# EAGLE board expLoRaBLE Thing Plus-Panel_v10 (EAGLE 9.6.2), part 1 of 7
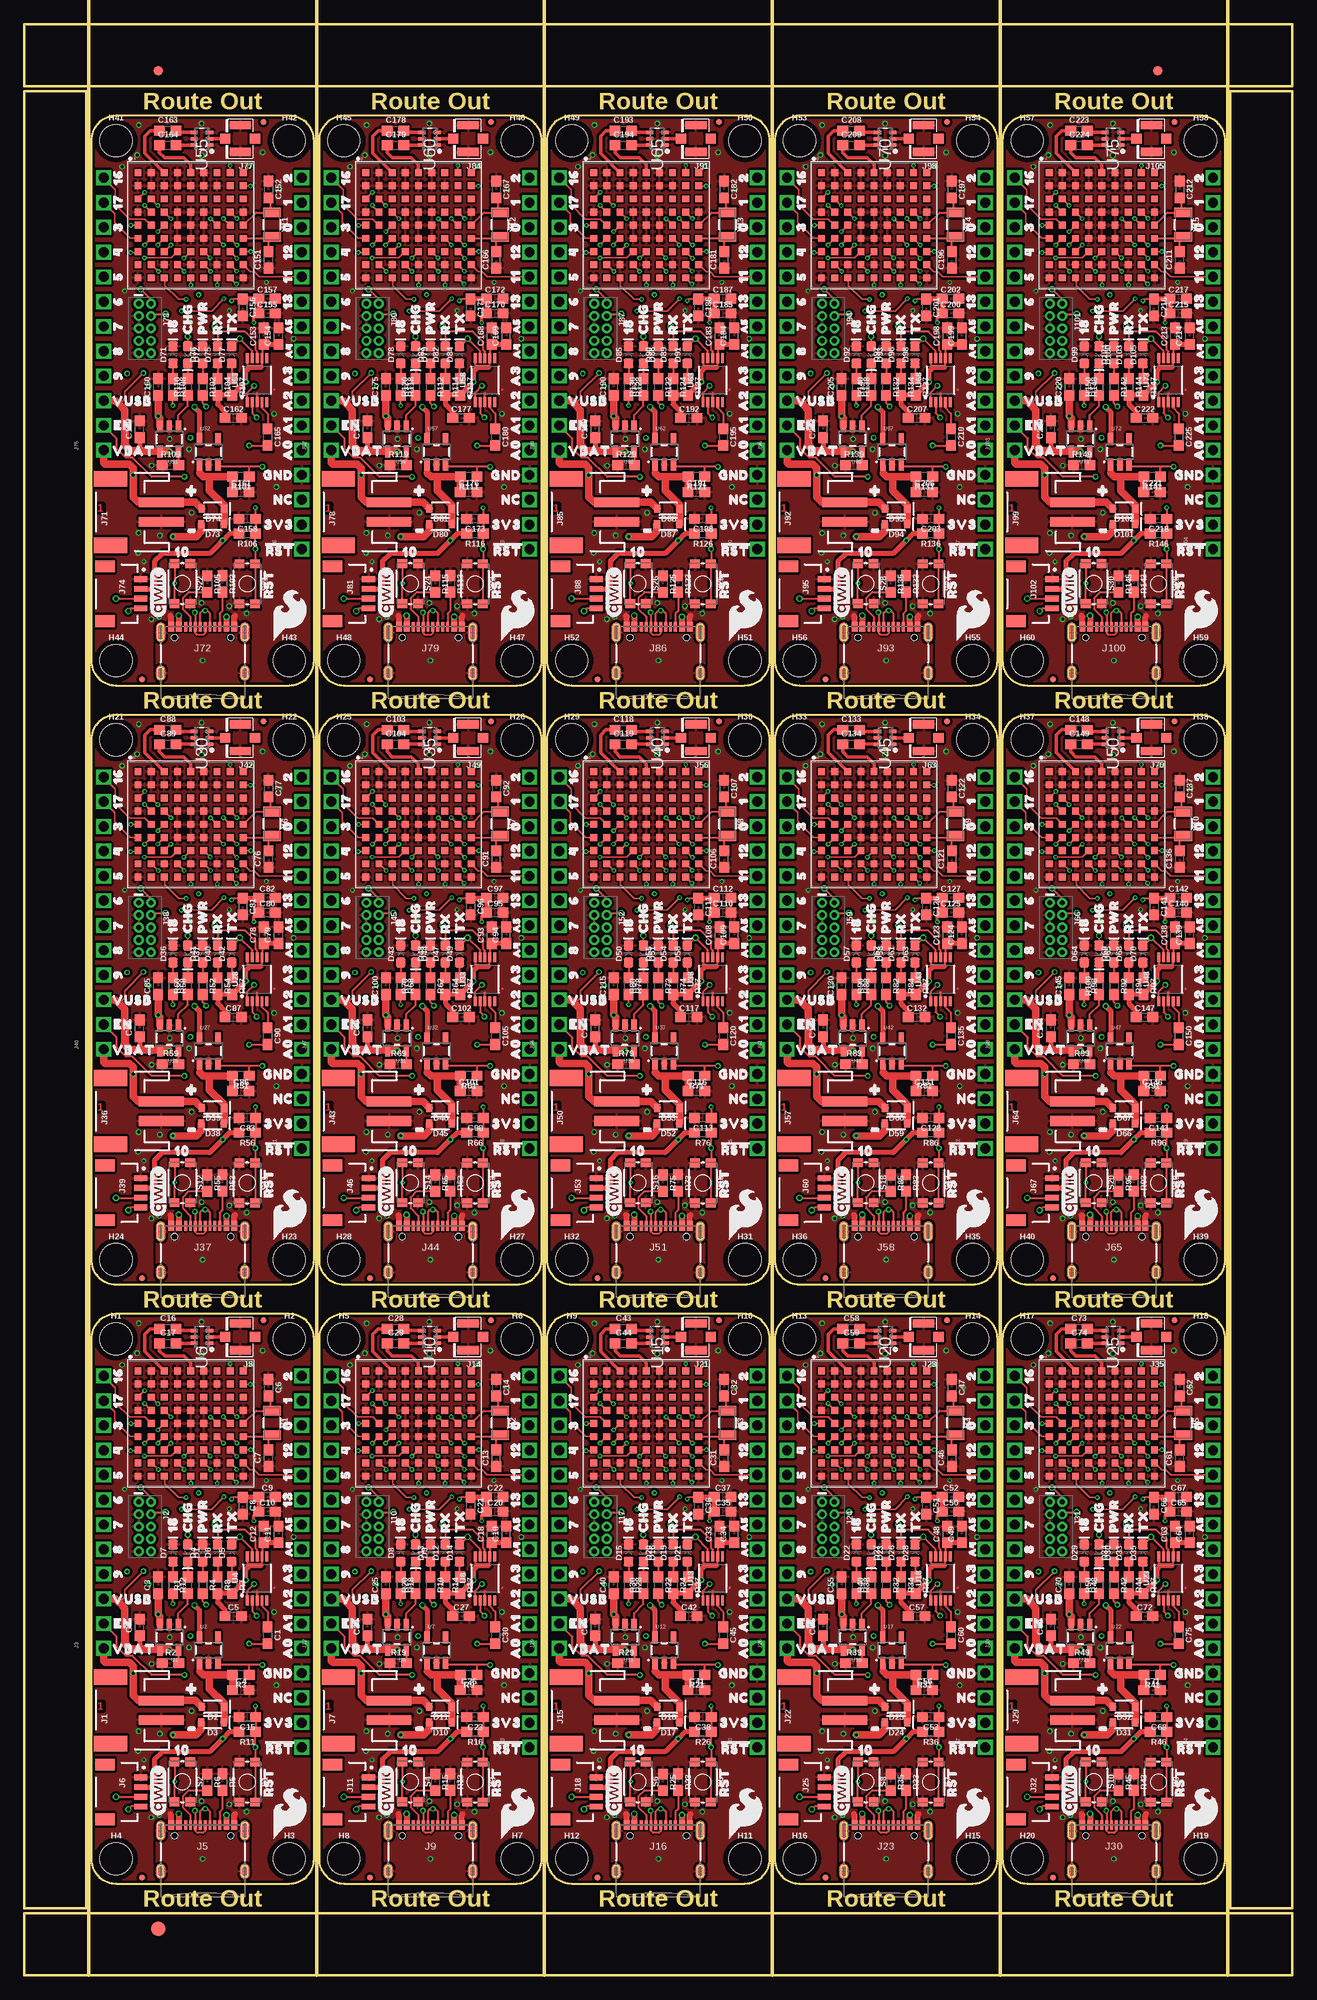
[diagram p0: board, top side]
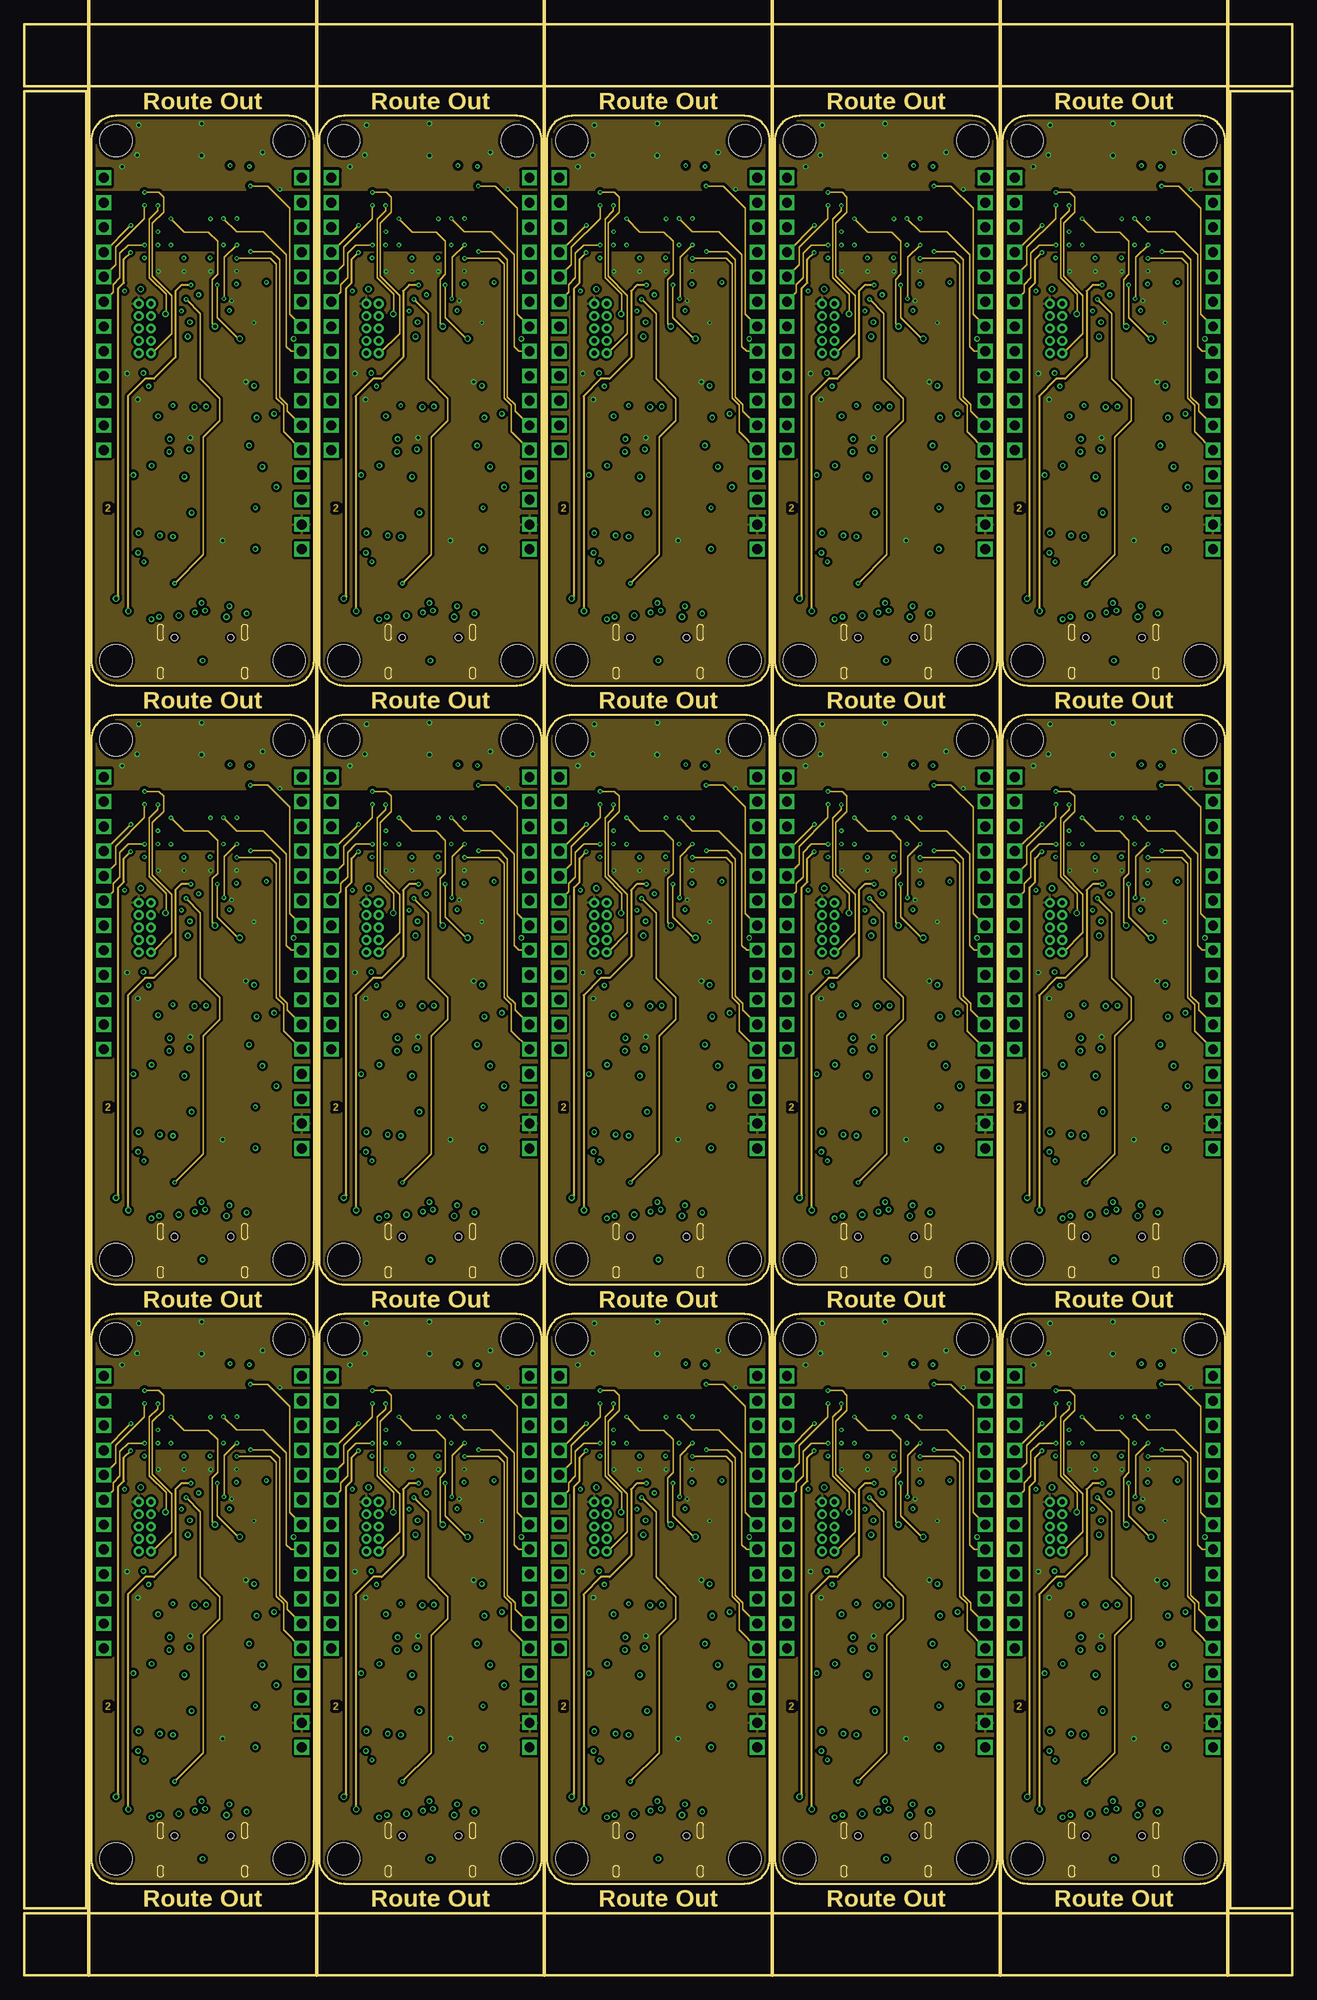
[diagram p1: board, inner layer Route2]
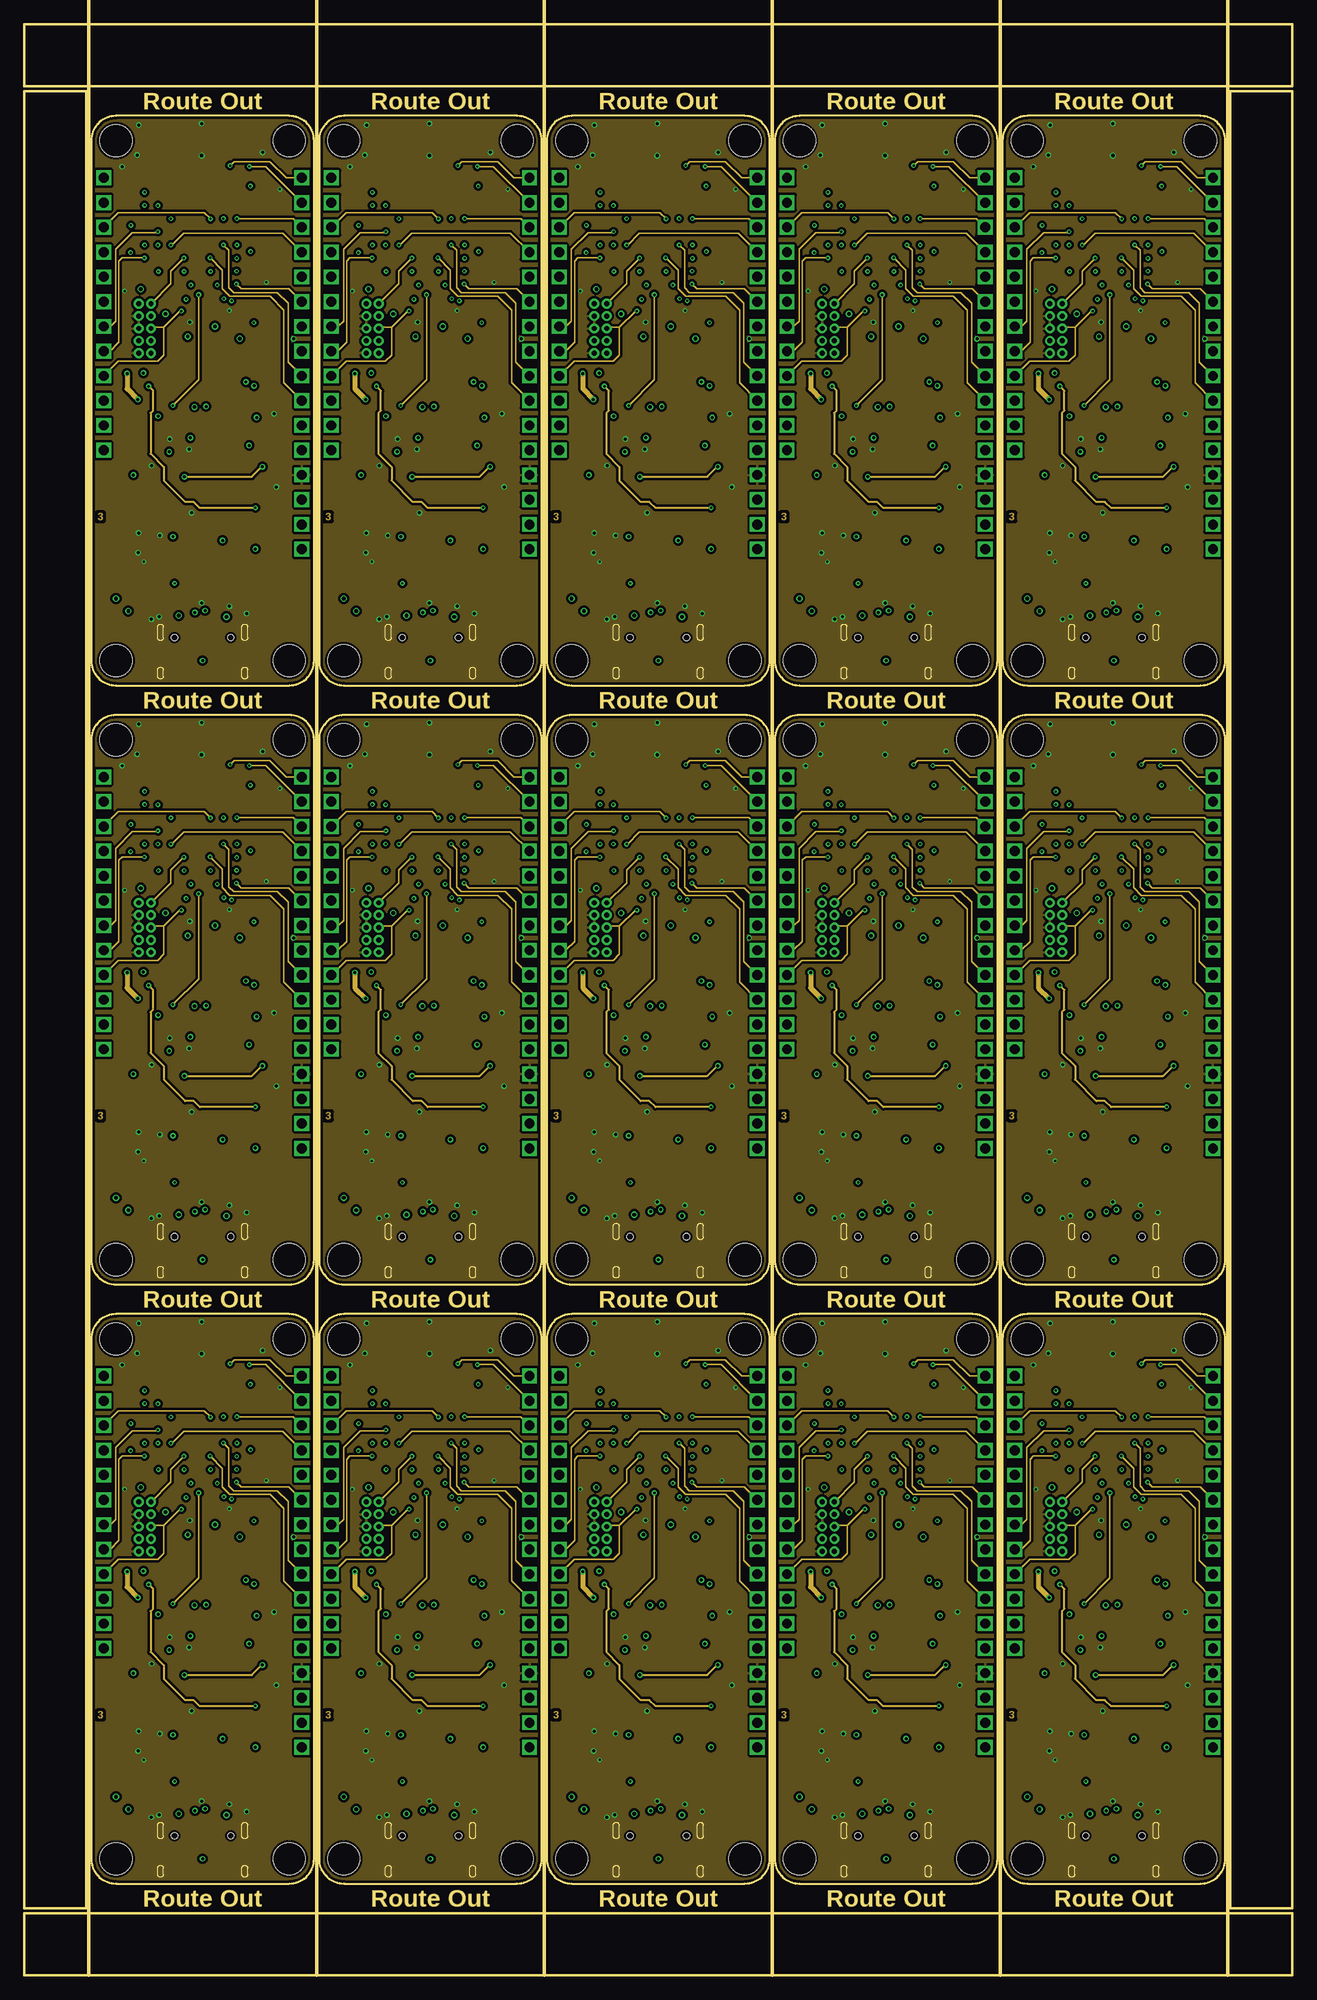
[diagram p2: board, inner layer Route15]
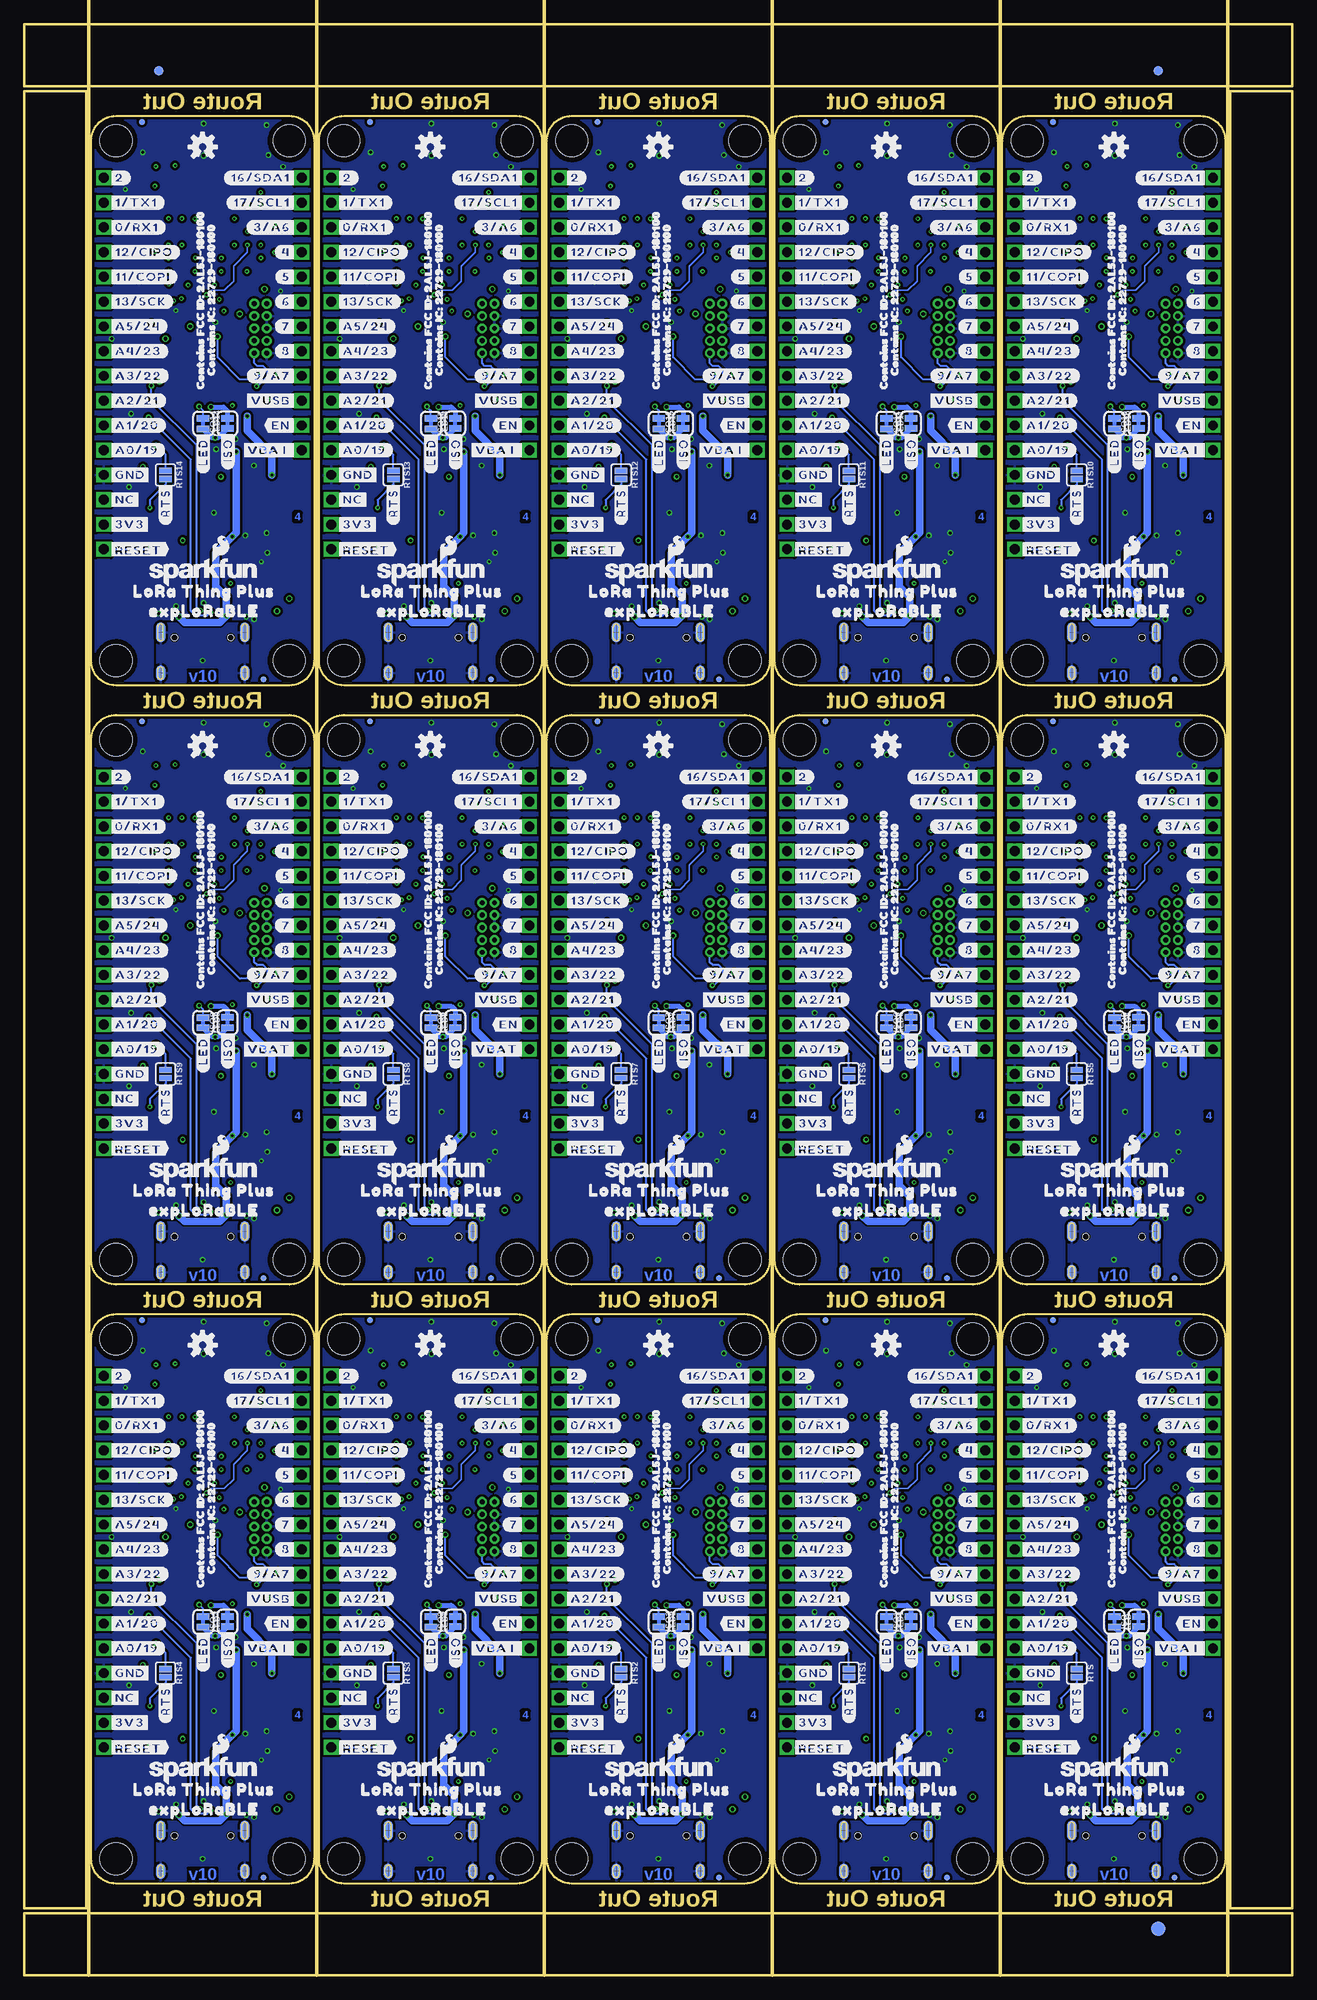
[diagram p3: board, bottom side, seen from below]

Size 130.05 x 200.15 mm. Coordinates in mm from the lower left corner, seen from the top.
Outline: 6.86,65.28 6.86,11.94 arc90 9.4,9.4 27.18,9.4 arc90 29.72,11.94 29.72,65.28 arc90 27.18,67.82 9.4,67.82 arc90 6.86,65.28
Outline: 30.23,65.28 30.23,11.94 arc90 32.77,9.4 50.55,9.4 arc90 53.09,11.94 53.09,65.28 arc90 50.55,67.82 32.77,67.82 arc90 30.23,65.28
Outline: 53.59,65.28 53.59,11.94 arc90 56.13,9.4 73.91,9.4 arc90 76.45,11.94 76.45,65.28 arc90 73.91,67.82 56.13,67.82 arc90 53.59,65.28
Outline: 76.96,65.28 76.96,11.94 arc90 79.5,9.4 97.28,9.4 arc90 99.82,11.94 99.82,65.28 arc90 97.28,67.82 79.5,67.82 arc90 76.96,65.28
Outline: 100.33,65.28 100.33,11.94 arc90 102.87,9.4 120.65,9.4 arc90 123.19,11.94 123.19,65.28 arc90 120.65,67.82 102.87,67.82 arc90 100.33,65.28
Outline: 6.86,126.75 6.86,73.41 arc90 9.4,70.87 27.18,70.87 arc90 29.72,73.41 29.72,126.75 arc90 27.18,129.29 9.4,129.29 arc90 6.86,126.75
Outline: 30.23,126.75 30.23,73.41 arc90 32.77,70.87 50.55,70.87 arc90 53.09,73.41 53.09,126.75 arc90 50.55,129.29 32.77,129.29 arc90 30.23,126.75
Outline: 53.59,126.75 53.59,73.41 arc90 56.13,70.87 73.91,70.87 arc90 76.45,73.41 76.45,126.75 arc90 73.91,129.29 56.13,129.29 arc90 53.59,126.75
Outline: 76.96,126.75 76.96,73.41 arc90 79.5,70.87 97.28,70.87 arc90 99.82,73.41 99.82,126.75 arc90 97.28,129.29 79.5,129.29 arc90 76.96,126.75
Outline: 100.33,126.75 100.33,73.41 arc90 102.87,70.87 120.65,70.87 arc90 123.19,73.41 123.19,126.75 arc90 120.65,129.29 102.87,129.29 arc90 100.33,126.75
Outline: 6.86,188.21 6.86,134.87 arc90 9.4,132.33 27.18,132.33 arc90 29.72,134.87 29.72,188.21 arc90 27.18,190.75 9.4,190.75 arc90 6.86,188.21
Outline: 30.23,188.21 30.23,134.87 arc90 32.77,132.33 50.55,132.33 arc90 53.09,134.87 53.09,188.21 arc90 50.55,190.75 32.77,190.75 arc90 30.23,188.21
Outline: 53.59,188.21 53.59,134.87 arc90 56.13,132.33 73.91,132.33 arc90 76.45,134.87 76.45,188.21 arc90 73.91,190.75 56.13,190.75 arc90 53.59,188.21
Outline: 76.96,188.21 76.96,134.87 arc90 79.5,132.33 97.28,132.33 arc90 99.82,134.87 99.82,188.21 arc90 97.28,190.75 79.5,190.75 arc90 76.96,188.21
Outline: 100.33,188.21 100.33,134.87 arc90 102.87,132.33 120.65,132.33 arc90 123.19,134.87 123.19,188.21 arc90 120.65,190.75 102.87,190.75 arc90 100.33,188.21
Outline: 0,6.35 130.05,6.35 130.05,0 0,0 0,6.35
Outline: 123.7,193.29 130.05,193.29 130.05,6.86 123.7,6.86 123.7,193.29
Outline: 0,200.15 130.05,200.15 130.05,193.8 0,193.8 0,200.15
Outline: 0,193.29 6.35,193.29 6.35,6.86 0,6.86 0,193.29
Copper layers (1+2*15+16): Top 0.035559375mm / dielectric 0.2mm / Route2 0.035559375mm / dielectric 1mm / Route15 0.035559375mm / dielectric 0.2mm / Bottom 0.035559375mm
Design rules "expLoRaBLE Thing Plus": minimum track width 6mil, minimum drill 8mil, track to track 6mil, track to pad 6mil, pad to pad 6mil, via to via 6mil, smd to smd 6mil, copper to edge 5mil, drill to drill 5mil, minimum pad ring 5mil, minimum via ring 5mil, stop-mask expansion 4mil, vias tented up to drill 25mil, thermal gap 10mil
Net classes: 1 power: width 0.762 mm
Milling: 6 lines

## Footprints (pad centres in the part's own frame; a part is rotated, then mirrored left to right if it is on the bottom)
0603 = smd 1.1 x 1: 1 -0.85,0; 2 0.85,0
LED-0603 = smd 1 x 1: A -0.877,0; C 0.877,0
SOD-323 = smd 0.63 x 0.83: A 1.15,0; C -1.15,0
FIDUCIAL-1X2 = smd 1 x 1: 1 0,0
FIDUCIAL-1.5X3 = smd 1.5 x 1.5: 1 0,0
FIDUCIAL-MICRO = smd 0.635 x 0.635: 1 0,0
STAND-OFF = hole 3.302: 0,0
SMT-JUMPER_2_NC_TRACE_SILK = smd 0.66 x 1.27: 1 -0.521,0; 2 0.521,0
JST-2-SMD = smd 1 x 4.6: 1 -1,-3.7; 2 1,-3.7 | smd 1.6 x 3.4: NC1 -3.4,1.5; NC2 3.4,1.5
2X5-PTH-1.27MM-NO_SILK = drill 0.508 pad 1: 1 -2.54,-0.635; 2 -2.54,0.635; 3 -1.27,-0.635; 4 -1.27,0.635; 5 0,-0.635; 6 0,0.635; 7 1.27,-0.635; 8 1.27,0.635; 9 2.54,-0.635; 10 2.54,0.635
1X12_SM_SQ_NOSILK = drill 1.016 pad 1.27 square: 1 0,0; 2 2.54,0; 3 5.08,0; 4 7.62,0; 5 10.16,0; 6 12.7,0; 7 15.24,0; 8 17.78,0; 9 20.32,0; 10 22.86,0; 11 25.4,0; 12 27.94,0
1X16_SM_SQ_NOSILK = drill 1.016 pad 1.27 square: 1 0,0; 2 2.54,0; 3 5.08,0; 4 7.62,0; 5 10.16,0; 6 12.7,0; 7 15.24,0; 8 17.78,0; 9 20.32,0; 10 22.86,0; 11 25.4,0; 12 27.94,0; 13 30.48,0; 14 33.02,0; 15 35.56,0; 16 38.1,0
USB-C-16P-4LAYER-ISOLATED = smd 0.3 x 1: A5 -1.25,-0.34; A6 -0.25,-0.34; A7 0.25,-0.34; A8 1.25,-0.34; B5 1.75,-0.34; B6 0.75,-0.34; B7 -0.75,-0.34; B8 -1.75,-0.34 | smd 0.6 x 1: GND -3.225,-0.34; GND2 3.225,-0.34; VBUS1 -2.45,-0.34; VBUS2 2.45,-0.34 | smd 1 x 2.1: SHLD1 -4.32,-0.915; SHLD2 4.32,-0.915 | smd 1 x 2.1 bottom: SHLD3 -4.32,-0.915; SHLD4 4.32,-0.915 | smd 1 x 1.6: SHLD5 -4.32,-5.095; SHLD8 4.32,-5.095 | smd 1 x 1.6 bottom: SHLD6 -4.32,-5.095; SHLD7 4.32,-5.095 | hole 0.65: -2.89,-1.445; 2.89,-1.445
JST04_1MM_RA = smd 0.6 x 1.35: 1 -1.5,0; 2 -0.5,0; 3 0.5,0; 4 1.5,0 | smd 1.2 x 2: NC1 2.8,-3.675; NC2 -2.8,-3.675
U.FL = smd 2.2 x 0.85: 1 0,1.375; 2 0,-1.375 | smd 1.05 x 1: FEED 1.525,0; NC -1.525,0
SMT-JUMPER_2_NO_SILK = smd 0.635 x 1.27: 1 -0.406,0; 2 0.406,0
TACTILE_SWITCH_SMD_4.6X2.8MM = smd 0.9 x 1: 1 -2.05,-0.8; 2 2.05,-0.8; 3 2.05,0.8; 4 -2.05,0.8
TP_15TH = drill 0.381 pad 0.61: P$1 0,0
SOT23-5 = smd 0.55 x 1.2: 1 -0.95,-1.3; 2 0,-1.3; 3 0.95,-1.3; 4 0.95,1.3; 5 -0.95,1.3
LGA81 = smd 0.7 x 0.7: A1 -5.4,5.4; A2 -4.05,5.4; A3 -2.7,5.4; A4 -1.35,5.4; A5 0,5.4; A6 1.35,5.4; A7 2.7,5.4; A8 4.05,5.4; A9 5.4,5.4; B1 -5.4,4.05; B2 -4.05,4.05; B3 -2.7,4.05; B4 -1.35,4.05; B5 0,4.05; B6 1.35,4.05; B7 2.7,4.05; B8 4.05,4.05; B9 5.4,4.05; C1 -5.4,2.7; C2 -4.05,2.7; C3 -2.7,2.7; C4 -1.35,2.7; C5 0,2.7; C6 1.35,2.7; C7 2.7,2.7; C8 4.05,2.7; C9 5.4,2.7; D1 -5.4,1.35; D2 -4.05,1.35; D3 -2.7,1.35; D4 -1.35,1.35; D5 0,1.35; D6 1.35,1.35; D7 2.7,1.35; D8 4.05,1.35; D9 5.4,1.35; E1 -5.4,0; E2 -4.05,0; E3 -2.7,0; E4 -1.35,0; E5 0,0; E6 1.35,0; E7 2.7,0; E8 4.05,0; E9 5.4,0; F1 -5.4,-1.35; F2 -4.05,-1.35; F3 -2.7,-1.35; F4 -1.35,-1.35; F5 0,-1.35; F6 1.35,-1.35; F7 2.7,-1.35; F8 4.05,-1.35; F9 5.4,-1.35; G1 -5.4,-2.7; G2 -4.05,-2.7; G3 -2.7,-2.7; G4 -1.35,-2.7; G5 0,-2.7; G6 1.35,-2.7; G7 2.7,-2.7; G8 4.05,-2.7; G9 5.4,-2.7; H1 -5.4,-4.05; H2 -4.05,-4.05; H3 -2.7,-4.05; H4 -1.35,-4.05; H5 0,-4.05; H6 1.35,-4.05; H7 2.7,-4.05; H8 4.05,-4.05; H9 5.4,-4.05; J1 -5.4,-5.4; J2 -4.05,-5.4; J3 -2.7,-5.4; J4 -1.35,-5.4; J5 0,-5.4; J6 1.35,-5.4; J7 2.7,-5.4; J8 4.05,-5.4; J9 5.4,-5.4
MSOP10 = smd 1 x 0.3: 1 -2.25,1; 2 -2.25,0.5; 3 -2.25,0; 4 -2.25,-0.5; 5 -2.25,-1; 6 2.25,-1; 7 2.25,-0.5; 8 2.25,0; 9 2.25,0.5; 10 2.25,1
RF_4060A1_TDK = smd 0.356 x 0.737: 1 -0.65,-0.787; 2 0,-0.787; 3 0.65,-0.787; 4 0.65,0.787; 5 0,0.787; 6 -0.65,0.787
CRYSTAL-SMD-3.2X1.5MM = smd 1 x 1.8: P$1 -1.25,0; P$2 1.25,0

## Placement (x,y rotation side)
C1  0.1uF  [0603]  24.94,34.87 270 top
C2  4.7uF  [0603]  11.82,35.67 90 top
C3  4.7uF  [0603]  13.72,40 90 top
C4  1.0uF  [0603]  22.2,29.24 0 top
C5  1.0uF  [0603]  21.42,36.83 0 top
C6  15pF  [0603]  25.03,60.27 270 top
C7  15pF  [0603]  25.04,53.05 90 top
C8  10uF  [0603]  22.4,48.16 270 top
C9  1.0uF  [0603]  24.89,49.08 0 top
C10  0.1uF  [0603]  24.89,47.57 0 top
C11  0.1uF  [0603]  26.07,45.22 90 top
C12  10nF  [0603]  24.56,45.22 90 top
C13  15pF  [0603]  48.41,53.05 90 top
C14  15pF  [0603]  48.4,60.27 270 top
C15  1nF  [0603]  22.86,26.48 180 top
C16  47pF  [0603]  14.7,66.31 0 top
C17  10pF  [0603]  14.7,64.82 0 top
C18  10nF  [0603]  47.93,45.22 90 top
C19  0.1uF  [0603]  49.44,45.22 90 top
C20  0.1uF  [0603]  48.26,47.57 0 top
C21  10uF  [0603]  45.77,48.16 270 top
C22  1.0uF  [0603]  48.26,49.08 0 top
C23  1nF  [0603]  46.23,26.48 180 top
C24  4.7uF  [0603]  35.19,35.67 90 top
C25  4.7uF  [0603]  37.08,40 90 top
C26  1.0uF  [0603]  45.57,29.24 0 top
C27  1.0uF  [0603]  44.79,36.83 0 top
C28  47pF  [0603]  38.07,66.31 0 top
C29  10pF  [0603]  38.07,64.82 0 top
C30  0.1uF  [0603]  48.31,34.87 270 top
C31  15pF  [0603]  71.78,53.05 90 top
C32  15pF  [0603]  71.77,60.27 270 top
C33  10nF  [0603]  71.3,45.22 90 top
C34  0.1uF  [0603]  72.81,45.22 90 top
C35  0.1uF  [0603]  71.62,47.57 0 top
C36  10uF  [0603]  69.14,48.16 270 top
C37  1.0uF  [0603]  71.62,49.08 0 top
C38  1nF  [0603]  69.6,26.48 180 top
C39  4.7uF  [0603]  58.56,35.67 90 top
C40  4.7uF  [0603]  60.45,40 90 top
C41  1.0uF  [0603]  68.94,29.24 0 top
C42  1.0uF  [0603]  68.16,36.83 0 top
C43  47pF  [0603]  61.44,66.31 0 top
C44  10pF  [0603]  61.44,64.82 0 top
C45  0.1uF  [0603]  71.68,34.87 270 top
C46  15pF  [0603]  95.15,53.05 90 top
C47  15pF  [0603]  95.14,60.27 270 top
C48  10nF  [0603]  94.67,45.22 90 top
C49  0.1uF  [0603]  96.18,45.22 90 top
C50  0.1uF  [0603]  94.99,47.57 0 top
C51  10uF  [0603]  92.5,48.16 270 top
C52  1.0uF  [0603]  94.99,49.08 0 top
C53  1nF  [0603]  92.96,26.48 180 top
C54  4.7uF  [0603]  81.93,35.67 90 top
C55  4.7uF  [0603]  83.82,40 90 top
C56  1.0uF  [0603]  92.3,29.24 0 top
C57  1.0uF  [0603]  91.52,36.83 0 top
C58  47pF  [0603]  84.81,66.31 0 top
C59  10pF  [0603]  84.81,64.82 0 top
C60  0.1uF  [0603]  95.05,34.87 270 top
C61  15pF  [0603]  118.51,53.05 90 top
C62  15pF  [0603]  118.5,60.27 270 top
C63  10nF  [0603]  118.03,45.22 90 top
C64  0.1uF  [0603]  119.55,45.22 90 top
C65  0.1uF  [0603]  118.36,47.57 0 top
C66  10uF  [0603]  115.87,48.16 270 top
C67  1.0uF  [0603]  118.36,49.08 0 top
C68  1nF  [0603]  116.33,26.48 180 top
C69  4.7uF  [0603]  105.3,35.67 90 top
C70  4.7uF  [0603]  107.19,40 90 top
C71  1.0uF  [0603]  115.67,29.24 0 top
C72  1.0uF  [0603]  114.89,36.83 0 top
C73  47pF  [0603]  108.17,66.31 0 top
C74  10pF  [0603]  108.17,64.82 0 top
C75  0.1uF  [0603]  118.41,34.87 270 top
C76  15pF  [0603]  25.04,114.52 90 top
C77  15pF  [0603]  25.03,121.74 270 top
C78  10nF  [0603]  24.56,106.68 90 top
C79  0.1uF  [0603]  26.07,106.68 90 top
C80  0.1uF  [0603]  24.89,109.04 0 top
C81  10uF  [0603]  22.4,109.63 270 top
C82  1.0uF  [0603]  24.89,110.55 0 top
C83  1nF  [0603]  22.86,87.95 180 top
C84  4.7uF  [0603]  11.82,97.14 90 top
C85  4.7uF  [0603]  13.72,101.47 90 top
C86  1.0uF  [0603]  22.2,90.7 0 top
C87  1.0uF  [0603]  21.42,98.3 0 top
C88  47pF  [0603]  14.7,127.78 0 top
C89  10pF  [0603]  14.7,126.28 0 top
C90  0.1uF  [0603]  24.94,96.34 270 top
C91  15pF  [0603]  48.41,114.52 90 top
C92  15pF  [0603]  48.4,121.74 270 top
C93  10nF  [0603]  47.93,106.68 90 top
C94  0.1uF  [0603]  49.44,106.68 90 top
C95  0.1uF  [0603]  48.26,109.04 0 top
C96  10uF  [0603]  45.77,109.63 270 top
C97  1.0uF  [0603]  48.26,110.55 0 top
C98  1nF  [0603]  46.23,87.95 180 top
C99  4.7uF  [0603]  35.19,97.14 90 top
C100  4.7uF  [0603]  37.08,101.47 90 top
C101  1.0uF  [0603]  45.57,90.7 0 top
C102  1.0uF  [0603]  44.79,98.3 0 top
C103  47pF  [0603]  38.07,127.78 0 top
C104  10pF  [0603]  38.07,126.28 0 top
C105  0.1uF  [0603]  48.31,96.34 270 top
C106  15pF  [0603]  71.78,114.52 90 top
C107  15pF  [0603]  71.77,121.74 270 top
C108  10nF  [0603]  71.3,106.68 90 top
C109  0.1uF  [0603]  72.81,106.68 90 top
C110  0.1uF  [0603]  71.62,109.04 0 top
C111  10uF  [0603]  69.14,109.63 270 top
C112  1.0uF  [0603]  71.62,110.55 0 top
C113  1nF  [0603]  69.6,87.95 180 top
C114  4.7uF  [0603]  58.56,97.14 90 top
C115  4.7uF  [0603]  60.45,101.47 90 top
C116  1.0uF  [0603]  68.94,90.7 0 top
C117  1.0uF  [0603]  68.16,98.3 0 top
C118  47pF  [0603]  61.44,127.78 0 top
C119  10pF  [0603]  61.44,126.28 0 top
C120  0.1uF  [0603]  71.68,96.34 270 top
C121  15pF  [0603]  95.15,114.52 90 top
C122  15pF  [0603]  95.14,121.74 270 top
C123  10nF  [0603]  94.67,106.68 90 top
C124  0.1uF  [0603]  96.18,106.68 90 top
C125  0.1uF  [0603]  94.99,109.04 0 top
C126  10uF  [0603]  92.5,109.63 270 top
C127  1.0uF  [0603]  94.99,110.55 0 top
C128  1nF  [0603]  92.96,87.95 180 top
C129  4.7uF  [0603]  81.93,97.14 90 top
C130  4.7uF  [0603]  83.82,101.47 90 top
C131  1.0uF  [0603]  92.3,90.7 0 top
C132  1.0uF  [0603]  91.52,98.3 0 top
C133  47pF  [0603]  84.81,127.78 0 top
C134  10pF  [0603]  84.81,126.28 0 top
C135  0.1uF  [0603]  95.05,96.34 270 top
C136  15pF  [0603]  118.51,114.52 90 top
C137  15pF  [0603]  118.5,121.74 270 top
C138  10nF  [0603]  118.03,106.68 90 top
C139  0.1uF  [0603]  119.55,106.68 90 top
C140  0.1uF  [0603]  118.36,109.04 0 top
C141  10uF  [0603]  115.87,109.63 270 top
C142  1.0uF  [0603]  118.36,110.55 0 top
C143  1nF  [0603]  116.33,87.95 180 top
C144  4.7uF  [0603]  105.3,97.14 90 top
C145  4.7uF  [0603]  107.19,101.47 90 top
C146  1.0uF  [0603]  115.67,90.7 0 top
C147  1.0uF  [0603]  114.89,98.3 0 top
C148  47pF  [0603]  108.17,127.78 0 top
C149  10pF  [0603]  108.17,126.28 0 top
C150  0.1uF  [0603]  118.41,96.34 270 top
C151  15pF  [0603]  25.04,175.98 90 top
C152  15pF  [0603]  25.03,183.21 270 top
C153  10nF  [0603]  24.56,168.15 90 top
C154  0.1uF  [0603]  26.07,168.15 90 top
C155  0.1uF  [0603]  24.89,170.51 0 top
C156  10uF  [0603]  22.4,171.1 270 top
C157  1.0uF  [0603]  24.89,172.02 0 top
C158  1nF  [0603]  22.86,149.42 180 top
C159  4.7uF  [0603]  11.82,158.61 90 top
C160  4.7uF  [0603]  13.72,162.94 90 top
C161  1.0uF  [0603]  22.2,152.17 0 top
C162  1.0uF  [0603]  21.42,159.77 0 top
C163  47pF  [0603]  14.7,189.24 0 top
C164  10pF  [0603]  14.7,187.75 0 top
C165  0.1uF  [0603]  24.94,157.81 270 top
C166  15pF  [0603]  48.41,175.98 90 top
C167  15pF  [0603]  48.4,183.21 270 top
C168  10nF  [0603]  47.93,168.15 90 top
C169  0.1uF  [0603]  49.44,168.15 90 top
C170  0.1uF  [0603]  48.26,170.51 0 top
C171  10uF  [0603]  45.77,171.1 270 top
C172  1.0uF  [0603]  48.26,172.02 0 top
C173  1nF  [0603]  46.23,149.42 180 top
C174  4.7uF  [0603]  35.19,158.61 90 top
C175  4.7uF  [0603]  37.08,162.94 90 top
C176  1.0uF  [0603]  45.57,152.17 0 top
C177  1.0uF  [0603]  44.79,159.77 0 top
C178  47pF  [0603]  38.07,189.24 0 top
C179  10pF  [0603]  38.07,187.75 0 top
C180  0.1uF  [0603]  48.31,157.81 270 top
C181  15pF  [0603]  71.78,175.98 90 top
C182  15pF  [0603]  71.77,183.21 270 top
C183  10nF  [0603]  71.3,168.15 90 top
C184  0.1uF  [0603]  72.81,168.15 90 top
C185  0.1uF  [0603]  71.62,170.51 0 top
C186  10uF  [0603]  69.14,171.1 270 top
C187  1.0uF  [0603]  71.62,172.02 0 top
C188  1nF  [0603]  69.6,149.42 180 top
C189  4.7uF  [0603]  58.56,158.61 90 top
C190  4.7uF  [0603]  60.45,162.94 90 top
C191  1.0uF  [0603]  68.94,152.17 0 top
C192  1.0uF  [0603]  68.16,159.77 0 top
C193  47pF  [0603]  61.44,189.24 0 top
C194  10pF  [0603]  61.44,187.75 0 top
C195  0.1uF  [0603]  71.68,157.81 270 top
C196  15pF  [0603]  95.15,175.98 90 top
C197  15pF  [0603]  95.14,183.21 270 top
C198  10nF  [0603]  94.67,168.15 90 top
C199  0.1uF  [0603]  96.18,168.15 90 top
C200  0.1uF  [0603]  94.99,170.51 0 top
C201  10uF  [0603]  92.5,171.1 270 top
C202  1.0uF  [0603]  94.99,172.02 0 top
C203  1nF  [0603]  92.96,149.42 180 top
C204  4.7uF  [0603]  81.93,158.61 90 top
C205  4.7uF  [0603]  83.82,162.94 90 top
C206  1.0uF  [0603]  92.3,152.17 0 top
C207  1.0uF  [0603]  91.52,159.77 0 top
C208  47pF  [0603]  84.81,189.24 0 top
C209  10pF  [0603]  84.81,187.75 0 top
C210  0.1uF  [0603]  95.05,157.81 270 top
C211  15pF  [0603]  118.51,175.98 90 top
C212  15pF  [0603]  118.5,183.21 270 top
C213  10nF  [0603]  118.03,168.15 90 top
C214  0.1uF  [0603]  119.55,168.15 90 top
C215  0.1uF  [0603]  118.36,170.51 0 top
C216  10uF  [0603]  115.87,171.1 270 top
C217  1.0uF  [0603]  118.36,172.02 0 top
C218  1nF  [0603]  116.33,149.42 180 top
C219  4.7uF  [0603]  105.3,158.61 90 top
C220  4.7uF  [0603]  107.19,162.94 90 top
C221  1.0uF  [0603]  115.67,152.17 0 top
C222  1.0uF  [0603]  114.89,159.77 0 top
C223  47pF  [0603]  108.17,189.24 0 top
C224  10pF  [0603]  108.17,187.75 0 top
C225  0.1uF  [0603]  118.41,157.81 270 top
D1  Yellow  [LED-0603]  16.76,43.31 270 top
D2  3A/10V/280mV  [SOD-323]  19.33,27.52 180 top
D3  3A/10V/280mV  [SOD-323]  19.3,25.93 180 top
D4  RED  [LED-0603]  18.29,43.31 90 top
D5  GREEN  [LED-0603]  21.26,43.31 90 top
D6  Yellow  [LED-0603]  19.81,43.31 90 top
D7  BLUE  [LED-0603]  15.24,43.31 90 top
D8  BLUE  [LED-0603]  38.61,43.31 90 top
D9  Yellow  [LED-0603]  40.13,43.31 270 top
D10  3A/10V/280mV  [SOD-323]  42.67,25.93 180 top
D11  3A/10V/280mV  [SOD-323]  42.7,27.52 180 top
D12  Yellow  [LED-0603]  43.18,43.31 90 top
D13  RED  [LED-0603]  41.66,43.31 90 top
D14  GREEN  [LED-0603]  44.63,43.31 90 top
D15  BLUE  [LED-0603]  61.98,43.31 90 top
D16  Yellow  [LED-0603]  63.5,43.31 270 top
D17  3A/10V/280mV  [SOD-323]  66.04,25.93 180 top
D18  3A/10V/280mV  [SOD-323]  66.07,27.52 180 top
D19  Yellow  [LED-0603]  66.55,43.31 90 top
D20  RED  [LED-0603]  65.02,43.31 90 top
D21  GREEN  [LED-0603]  68,43.31 90 top
D22  BLUE  [LED-0603]  85.34,43.31 90 top
D23  Yellow  [LED-0603]  86.87,43.31 270 top
D24  3A/10V/280mV  [SOD-323]  89.41,25.93 180 top
D25  3A/10V/280mV  [SOD-323]  89.43,27.52 180 top
D26  Yellow  [LED-0603]  89.92,43.31 90 top
D27  RED  [LED-0603]  88.39,43.31 90 top
D28  GREEN  [LED-0603]  91.36,43.31 90 top
D29  BLUE  [LED-0603]  108.71,43.31 90 top
D30  Yellow  [LED-0603]  110.24,43.31 270 top
D31  3A/10V/280mV  [SOD-323]  112.78,25.93 180 top
D32  3A/10V/280mV  [SOD-323]  112.8,27.52 180 top
D33  Yellow  [LED-0603]  113.28,43.31 90 top
D34  RED  [LED-0603]  111.76,43.31 90 top
D35  GREEN  [LED-0603]  114.73,43.31 90 top
D36  BLUE  [LED-0603]  15.24,104.77 90 top
D37  Yellow  [LED-0603]  16.76,104.77 270 top
D38  3A/10V/280mV  [SOD-323]  19.3,87.4 180 top
D39  3A/10V/280mV  [SOD-323]  19.33,88.99 180 top
D40  Yellow  [LED-0603]  19.81,104.77 90 top
D41  RED  [LED-0603]  18.29,104.77 90 top
D42  GREEN  [LED-0603]  21.26,104.77 90 top
D43  BLUE  [LED-0603]  38.61,104.77 90 top
D44  Yellow  [LED-0603]  40.13,104.77 270 top
D45  3A/10V/280mV  [SOD-323]  42.67,87.4 180 top
D46  3A/10V/280mV  [SOD-323]  42.7,88.99 180 top
D47  Yellow  [LED-0603]  43.18,104.77 90 top
D48  RED  [LED-0603]  41.66,104.77 90 top
D49  GREEN  [LED-0603]  44.63,104.77 90 top
D50  BLUE  [LED-0603]  61.98,104.77 90 top
D51  Yellow  [LED-0603]  63.5,104.77 270 top
D52  3A/10V/280mV  [SOD-323]  66.04,87.4 180 top
D53  3A/10V/280mV  [SOD-323]  66.07,88.99 180 top
D54  Yellow  [LED-0603]  66.55,104.77 90 top
D55  RED  [LED-0603]  65.02,104.77 90 top
D56  GREEN  [LED-0603]  68,104.77 90 top
D57  BLUE  [LED-0603]  85.34,104.77 90 top
D58  Yellow  [LED-0603]  86.87,104.77 270 top
D59  3A/10V/280mV  [SOD-323]  89.41,87.4 180 top
D60  3A/10V/280mV  [SOD-323]  89.43,88.99 180 top
D61  Yellow  [LED-0603]  89.92,104.77 90 top
D62  RED  [LED-0603]  88.39,104.77 90 top
D63  GREEN  [LED-0603]  91.36,104.77 90 top
D64  BLUE  [LED-0603]  108.71,104.77 90 top
D65  Yellow  [LED-0603]  110.24,104.77 270 top
D66  3A/10V/280mV  [SOD-323]  112.78,87.4 180 top
D67  3A/10V/280mV  [SOD-323]  112.8,88.99 180 top
D68  Yellow  [LED-0603]  113.28,104.77 90 top
D69  RED  [LED-0603]  111.76,104.77 90 top
D70  GREEN  [LED-0603]  114.73,104.77 90 top
D71  BLUE  [LED-0603]  15.24,166.24 90 top
D72  Yellow  [LED-0603]  16.76,166.24 270 top
D73  3A/10V/280mV  [SOD-323]  19.3,148.87 180 top
D74  3A/10V/280mV  [SOD-323]  19.33,150.46 180 top
D75  Yellow  [LED-0603]  19.81,166.24 90 top
D76  RED  [LED-0603]  18.29,166.24 90 top
D77  GREEN  [LED-0603]  21.26,166.24 90 top
D78  BLUE  [LED-0603]  38.61,166.24 90 top
D79  Yellow  [LED-0603]  40.13,166.24 270 top
D80  3A/10V/280mV  [SOD-323]  42.67,148.87 180 top
D81  3A/10V/280mV  [SOD-323]  42.7,150.46 180 top
D82  Yellow  [LED-0603]  43.18,166.24 90 top
D83  RED  [LED-0603]  41.66,166.24 90 top
D84  GREEN  [LED-0603]  44.63,166.24 90 top
D85  BLUE  [LED-0603]  61.98,166.24 90 top
D86  Yellow  [LED-0603]  63.5,166.24 270 top
D87  3A/10V/280mV  [SOD-323]  66.04,148.87 180 top
D88  3A/10V/280mV  [SOD-323]  66.07,150.46 180 top
D89  Yellow  [LED-0603]  66.55,166.24 90 top
D90  RED  [LED-0603]  65.02,166.24 90 top
D91  GREEN  [LED-0603]  68,166.24 90 top
D92  BLUE  [LED-0603]  85.34,166.24 90 top
D93  Yellow  [LED-0603]  86.87,166.24 270 top
D94  3A/10V/280mV  [SOD-323]  89.41,148.87 180 top
D95  3A/10V/280mV  [SOD-323]  89.43,150.46 180 top
D96  Yellow  [LED-0603]  89.92,166.24 90 top
D97  RED  [LED-0603]  88.39,166.24 90 top
D98  GREEN  [LED-0603]  91.36,166.24 90 top
D99  BLUE  [LED-0603]  108.71,166.24 90 top
D100  Yellow  [LED-0603]  110.24,166.24 270 top
D101  3A/10V/280mV  [SOD-323]  112.78,148.87 180 top
D102  3A/10V/280mV  [SOD-323]  112.8,150.46 180 top
D103  Yellow  [LED-0603]  113.28,166.24 90 top
D104  RED  [LED-0603]  111.76,166.24 90 top
D105  GREEN  [LED-0603]  114.73,166.24 90 top
E$1  [FIDUCIAL-1X2]  13.72,195.39 0 top
E$2  [FIDUCIAL-1X2]  13.72,195.39 0 bottom
E$3  [FIDUCIAL-1X2]  116.27,195.39 0 top
E$4  [FIDUCIAL-1X2]  116.27,195.39 0 bottom
E$5  [FIDUCIAL-1.5X3]  13.72,4.76 0 top
E$6  [FIDUCIAL-1.5X3]  13.72,4.76 0 bottom
FD1  FIDUCIALUFIDUCIAL  [FIDUCIAL-MICRO]  24.51,67.18 0 bottom
FD2  FIDUCIALUFIDUCIAL  [FIDUCIAL-MICRO]  24.51,67.18 0 top
FD3  FIDUCIALUFIDUCIAL  [FIDUCIAL-MICRO]  12.06,10.03 0 bottom
FD4  FIDUCIALUFIDUCIAL  [FIDUCIAL-MICRO]  12.06,10.03 0 top
FD5  FIDUCIALUFIDUCIAL  [FIDUCIAL-MICRO]  47.88,67.18 0 bottom
FD6  FIDUCIALUFIDUCIAL  [FIDUCIAL-MICRO]  47.88,67.18 0 top
FD7  FIDUCIALUFIDUCIAL  [FIDUCIAL-MICRO]  35.43,10.03 0 bottom
FD8  FIDUCIALUFIDUCIAL  [FIDUCIAL-MICRO]  35.43,10.03 0 top
FD9  FIDUCIALUFIDUCIAL  [FIDUCIAL-MICRO]  71.25,67.18 0 bottom
FD10  FIDUCIALUFIDUCIAL  [FIDUCIAL-MICRO]  71.25,67.18 0 top
FD11  FIDUCIALUFIDUCIAL  [FIDUCIAL-MICRO]  58.8,10.03 0 bottom
FD12  FIDUCIALUFIDUCIAL  [FIDUCIAL-MICRO]  58.8,10.03 0 top
FD13  FIDUCIALUFIDUCIAL  [FIDUCIAL-MICRO]  94.62,67.18 0 bottom
FD14  FIDUCIALUFIDUCIAL  [FIDUCIAL-MICRO]  94.62,67.18 0 top
FD15  FIDUCIALUFIDUCIAL  [FIDUCIAL-MICRO]  82.17,10.03 0 bottom
FD16  FIDUCIALUFIDUCIAL  [FIDUCIAL-MICRO]  82.17,10.03 0 top
FD17  FIDUCIALUFIDUCIAL  [FIDUCIAL-MICRO]  117.98,67.18 0 bottom
FD18  FIDUCIALUFIDUCIAL  [FIDUCIAL-MICRO]  117.98,67.18 0 top
FD19  FIDUCIALUFIDUCIAL  [FIDUCIAL-MICRO]  105.54,10.03 0 bottom
FD20  FIDUCIALUFIDUCIAL  [FIDUCIAL-MICRO]  105.54,10.03 0 top
FD21  FIDUCIALUFIDUCIAL  [FIDUCIAL-MICRO]  24.51,128.65 0 bottom
FD22  FIDUCIALUFIDUCIAL  [FIDUCIAL-MICRO]  24.51,128.65 0 top
FD23  FIDUCIALUFIDUCIAL  [FIDUCIAL-MICRO]  12.06,71.5 0 bottom
FD24  FIDUCIALUFIDUCIAL  [FIDUCIAL-MICRO]  12.06,71.5 0 top
FD25  FIDUCIALUFIDUCIAL  [FIDUCIAL-MICRO]  47.88,128.65 0 bottom
FD26  FIDUCIALUFIDUCIAL  [FIDUCIAL-MICRO]  47.88,128.65 0 top
FD27  FIDUCIALUFIDUCIAL  [FIDUCIAL-MICRO]  35.43,71.5 0 bottom
FD28  FIDUCIALUFIDUCIAL  [FIDUCIAL-MICRO]  35.43,71.5 0 top
FD29  FIDUCIALUFIDUCIAL  [FIDUCIAL-MICRO]  71.25,128.65 0 bottom
FD30  FIDUCIALUFIDUCIAL  [FIDUCIAL-MICRO]  71.25,128.65 0 top
FD31  FIDUCIALUFIDUCIAL  [FIDUCIAL-MICRO]  58.8,71.5 0 bottom
FD32  FIDUCIALUFIDUCIAL  [FIDUCIAL-MICRO]  58.8,71.5 0 top
FD33  FIDUCIALUFIDUCIAL  [FIDUCIAL-MICRO]  94.62,128.65 0 bottom
FD34  FIDUCIALUFIDUCIAL  [FIDUCIAL-MICRO]  94.62,128.65 0 top
FD35  FIDUCIALUFIDUCIAL  [FIDUCIAL-MICRO]  82.17,71.5 0 bottom
FD36  FIDUCIALUFIDUCIAL  [FIDUCIAL-MICRO]  82.17,71.5 0 top
FD37  FIDUCIALUFIDUCIAL  [FIDUCIAL-MICRO]  117.98,128.65 0 bottom
FD38  FIDUCIALUFIDUCIAL  [FIDUCIAL-MICRO]  117.98,128.65 0 top
FD39  FIDUCIALUFIDUCIAL  [FIDUCIAL-MICRO]  105.54,71.5 0 bottom
FD40  FIDUCIALUFIDUCIAL  [FIDUCIAL-MICRO]  105.54,71.5 0 top
FD41  FIDUCIALUFIDUCIAL  [FIDUCIAL-MICRO]  24.51,190.12 0 bottom
FD42  FIDUCIALUFIDUCIAL  [FIDUCIAL-MICRO]  24.51,190.12 0 top
FD43  FIDUCIALUFIDUCIAL  [FIDUCIAL-MICRO]  12.06,132.97 0 bottom
FD44  FIDUCIALUFIDUCIAL  [FIDUCIAL-MICRO]  12.06,132.97 0 top
FD45  FIDUCIALUFIDUCIAL  [FIDUCIAL-MICRO]  47.88,190.12 0 bottom
FD46  FIDUCIALUFIDUCIAL  [FIDUCIAL-MICRO]  47.88,190.12 0 top
FD47  FIDUCIALUFIDUCIAL  [FIDUCIAL-MICRO]  35.43,132.97 0 bottom
FD48  FIDUCIALUFIDUCIAL  [FIDUCIAL-MICRO]  35.43,132.97 0 top
FD49  FIDUCIALUFIDUCIAL  [FIDUCIAL-MICRO]  71.25,190.12 0 bottom
FD50  FIDUCIALUFIDUCIAL  [FIDUCIAL-MICRO]  71.25,190.12 0 top
FD51  FIDUCIALUFIDUCIAL  [FIDUCIAL-MICRO]  58.8,132.97 0 bottom
FD52  FIDUCIALUFIDUCIAL  [FIDUCIAL-MICRO]  58.8,132.97 0 top
FD53  FIDUCIALUFIDUCIAL  [FIDUCIAL-MICRO]  94.62,190.12 0 bottom
FD54  FIDUCIALUFIDUCIAL  [FIDUCIAL-MICRO]  94.62,190.12 0 top
FD55  FIDUCIALUFIDUCIAL  [FIDUCIAL-MICRO]  82.17,132.97 0 bottom
FD56  FIDUCIALUFIDUCIAL  [FIDUCIAL-MICRO]  82.17,132.97 0 top
FD57  FIDUCIALUFIDUCIAL  [FIDUCIAL-MICRO]  117.98,190.12 0 bottom
FD58  FIDUCIALUFIDUCIAL  [FIDUCIAL-MICRO]  117.98,190.12 0 top
FD59  FIDUCIALUFIDUCIAL  [FIDUCIAL-MICRO]  105.54,132.97 0 bottom
FD60  FIDUCIALUFIDUCIAL  [FIDUCIAL-MICRO]  105.54,132.97 0 top
FRAME1  FRAME-LETTER  [CREATIVE_COMMONS]  -5.84,-10.92 0 top  (outside the outline)
FRAME2  FRAME-LETTERNO_PACKAGE  [DUMMY]  -5.84,-10.92 0 top  (outside the outline)
FRAME3  FRAME-LETTER  [CREATIVE_COMMONS]  17.53,-10.92 0 top  (outside the outline)
FRAME4  FRAME-LETTERNO_PACKAGE  [DUMMY]  17.53,-10.92 0 top  (outside the outline)
FRAME5  FRAME-LETTER  [CREATIVE_COMMONS]  40.89,-10.92 0 top  (outside the outline)
FRAME6  FRAME-LETTERNO_PACKAGE  [DUMMY]  40.89,-10.92 0 top  (outside the outline)
FRAME7  FRAME-LETTER  [CREATIVE_COMMONS]  64.26,-10.92 0 top  (outside the outline)
FRAME8  FRAME-LETTERNO_PACKAGE  [DUMMY]  64.26,-10.92 0 top  (outside the outline)
FRAME9  FRAME-LETTER  [CREATIVE_COMMONS]  87.63,-10.92 0 top  (outside the outline)
FRAME10  FRAME-LETTERNO_PACKAGE  [DUMMY]  87.63,-10.92 0 top  (outside the outline)
FRAME11  FRAME-LETTER  [CREATIVE_COMMONS]  -5.84,50.55 0 top  (outside the outline)
FRAME12  FRAME-LETTERNO_PACKAGE  [DUMMY]  -5.84,50.55 0 top  (outside the outline)
FRAME13  FRAME-LETTER  [CREATIVE_COMMONS]  17.53,50.55 0 top
FRAME14  FRAME-LETTERNO_PACKAGE  [DUMMY]  17.53,50.55 0 top
FRAME15  FRAME-LETTER  [CREATIVE_COMMONS]  40.89,50.55 0 top
FRAME16  FRAME-LETTERNO_PACKAGE  [DUMMY]  40.89,50.55 0 top
FRAME17  FRAME-LETTER  [CREATIVE_COMMONS]  64.26,50.55 0 top
FRAME18  FRAME-LETTERNO_PACKAGE  [DUMMY]  64.26,50.55 0 top
FRAME19  FRAME-LETTER  [CREATIVE_COMMONS]  87.63,50.55 0 top
FRAME20  FRAME-LETTERNO_PACKAGE  [DUMMY]  87.63,50.55 0 top
FRAME21  FRAME-LETTER  [CREATIVE_COMMONS]  -5.84,112.01 0 top  (outside the outline)
FRAME22  FRAME-LETTERNO_PACKAGE  [DUMMY]  -5.84,112.01 0 top  (outside the outline)
FRAME23  FRAME-LETTER  [CREATIVE_COMMONS]  17.53,112.01 0 top
FRAME24  FRAME-LETTERNO_PACKAGE  [DUMMY]  17.53,112.01 0 top
FRAME25  FRAME-LETTER  [CREATIVE_COMMONS]  40.89,112.01 0 top
FRAME26  FRAME-LETTERNO_PACKAGE  [DUMMY]  40.89,112.01 0 top
FRAME27  FRAME-LETTER  [CREATIVE_COMMONS]  64.26,112.01 0 top
FRAME28  FRAME-LETTERNO_PACKAGE  [DUMMY]  64.26,112.01 0 top
FRAME29  FRAME-LETTER  [CREATIVE_COMMONS]  87.63,112.01 0 top
FRAME30  FRAME-LETTERNO_PACKAGE  [DUMMY]  87.63,112.01 0 top
H1  STAND-OFF  [STAND-OFF]  9.4,65.28 0 top
H2  STAND-OFF  [STAND-OFF]  27.18,65.28 0 top
H3  STAND-OFF  [STAND-OFF]  27.18,11.94 0 top
H4  STAND-OFF  [STAND-OFF]  9.4,11.94 0 top
H5  STAND-OFF  [STAND-OFF]  32.77,65.28 0 top
H6  STAND-OFF  [STAND-OFF]  50.55,65.28 0 top
H7  STAND-OFF  [STAND-OFF]  50.55,11.94 0 top
H8  STAND-OFF  [STAND-OFF]  32.77,11.94 0 top
H9  STAND-OFF  [STAND-OFF]  56.13,65.28 0 top
H10  STAND-OFF  [STAND-OFF]  73.91,65.28 0 top
H11  STAND-OFF  [STAND-OFF]  73.91,11.94 0 top
H12  STAND-OFF  [STAND-OFF]  56.13,11.94 0 top
H13  STAND-OFF  [STAND-OFF]  79.5,65.28 0 top
H14  STAND-OFF  [STAND-OFF]  97.28,65.28 0 top
H15  STAND-OFF  [STAND-OFF]  97.28,11.94 0 top
H16  STAND-OFF  [STAND-OFF]  79.5,11.94 0 top
H17  STAND-OFF  [STAND-OFF]  102.87,65.28 0 top
H18  STAND-OFF  [STAND-OFF]  120.65,65.28 0 top
H19  STAND-OFF  [STAND-OFF]  120.65,11.94 0 top
H20  STAND-OFF  [STAND-OFF]  102.87,11.94 0 top
H21  STAND-OFF  [STAND-OFF]  9.4,126.75 0 top
H22  STAND-OFF  [STAND-OFF]  27.18,126.75 0 top
H23  STAND-OFF  [STAND-OFF]  27.18,73.41 0 top
H24  STAND-OFF  [STAND-OFF]  9.4,73.41 0 top
H25  STAND-OFF  [STAND-OFF]  32.77,126.75 0 top
H26  STAND-OFF  [STAND-OFF]  50.55,126.75 0 top
H27  STAND-OFF  [STAND-OFF]  50.55,73.41 0 top
H28  STAND-OFF  [STAND-OFF]  32.77,73.41 0 top
H29  STAND-OFF  [STAND-OFF]  56.13,126.75 0 top
H30  STAND-OFF  [STAND-OFF]  73.91,126.75 0 top
H31  STAND-OFF  [STAND-OFF]  73.91,73.41 0 top
H32  STAND-OFF  [STAND-OFF]  56.13,73.41 0 top
H33  STAND-OFF  [STAND-OFF]  79.5,126.75 0 top
H34  STAND-OFF  [STAND-OFF]  97.28,126.75 0 top
H35  STAND-OFF  [STAND-OFF]  97.28,73.41 0 top
H36  STAND-OFF  [STAND-OFF]  79.5,73.41 0 top
H37  STAND-OFF  [STAND-OFF]  102.87,126.75 0 top
H38  STAND-OFF  [STAND-OFF]  120.65,126.75 0 top
H39  STAND-OFF  [STAND-OFF]  120.65,73.41 0 top
H40  STAND-OFF  [STAND-OFF]  102.87,73.41 0 top
H41  STAND-OFF  [STAND-OFF]  9.4,188.21 0 top
H42  STAND-OFF  [STAND-OFF]  27.18,188.21 0 top
H43  STAND-OFF  [STAND-OFF]  27.18,134.87 0 top
H44  STAND-OFF  [STAND-OFF]  9.4,134.87 0 top
H45  STAND-OFF  [STAND-OFF]  32.77,188.21 0 top
H46  STAND-OFF  [STAND-OFF]  50.55,188.21 0 top
H47  STAND-OFF  [STAND-OFF]  50.55,134.87 0 top
H48  STAND-OFF  [STAND-OFF]  32.77,134.87 0 top
H49  STAND-OFF  [STAND-OFF]  56.13,188.21 0 top
H50  STAND-OFF  [STAND-OFF]  73.91,188.21 0 top
H51  STAND-OFF  [STAND-OFF]  73.91,134.87 0 top
H52  STAND-OFF  [STAND-OFF]  56.13,134.87 0 top
H53  STAND-OFF  [STAND-OFF]  79.5,188.21 0 top
H54  STAND-OFF  [STAND-OFF]  97.28,188.21 0 top
H55  STAND-OFF  [STAND-OFF]  97.28,134.87 0 top
H56  STAND-OFF  [STAND-OFF]  79.5,134.87 0 top
H57  STAND-OFF  [STAND-OFF]  102.87,188.21 0 top
H58  STAND-OFF  [STAND-OFF]  120.65,188.21 0 top
H59  STAND-OFF  [STAND-OFF]  120.65,134.87 0 top
H60  STAND-OFF  [STAND-OFF]  102.87,134.87 0 top
ISO  JUMPER-SMT_2_NC_TRACE_SILK  [SMT-JUMPER_2_NC_TRACE_SILK]  15.75,36.27 90 bottom
ISO1  JUMPER-SMT_2_NC_TRACE_SILK  [SMT-JUMPER_2_NC_TRACE_SILK]  39.12,36.27 90 bottom
ISO2  JUMPER-SMT_2_NC_TRACE_SILK  [SMT-JUMPER_2_NC_TRACE_SILK]  62.48,36.27 90 bottom
ISO3  JUMPER-SMT_2_NC_TRACE_SILK  [SMT-JUMPER_2_NC_TRACE_SILK]  85.85,36.27 90 bottom
ISO4  JUMPER-SMT_2_NC_TRACE_SILK  [SMT-JUMPER_2_NC_TRACE_SILK]  109.22,36.27 90 bottom
ISO5  JUMPER-SMT_2_NC_TRACE_SILK  [SMT-JUMPER_2_NC_TRACE_SILK]  15.75,97.74 90 bottom
ISO6  JUMPER-SMT_2_NC_TRACE_SILK  [SMT-JUMPER_2_NC_TRACE_SILK]  39.12,97.74 90 bottom
ISO7  JUMPER-SMT_2_NC_TRACE_SILK  [SMT-JUMPER_2_NC_TRACE_SILK]  62.48,97.74 90 bottom
ISO8  JUMPER-SMT_2_NC_TRACE_SILK  [SMT-JUMPER_2_NC_TRACE_SILK]  85.85,97.74 90 bottom
ISO9  JUMPER-SMT_2_NC_TRACE_SILK  [SMT-JUMPER_2_NC_TRACE_SILK]  109.22,97.74 90 bottom
ISO10  JUMPER-SMT_2_NC_TRACE_SILK  [SMT-JUMPER_2_NC_TRACE_SILK]  15.75,159.21 90 bottom
ISO11  JUMPER-SMT_2_NC_TRACE_SILK  [SMT-JUMPER_2_NC_TRACE_SILK]  39.12,159.21 90 bottom
ISO12  JUMPER-SMT_2_NC_TRACE_SILK  [SMT-JUMPER_2_NC_TRACE_SILK]  62.48,159.21 90 bottom
ISO13  JUMPER-SMT_2_NC_TRACE_SILK  [SMT-JUMPER_2_NC_TRACE_SILK]  85.85,159.21 90 bottom
ISO14  JUMPER-SMT_2_NC_TRACE_SILK  [SMT-JUMPER_2_NC_TRACE_SILK]  109.22,159.21 90 bottom
J1  [JST-2-SMD]  10.34,27.18 90 top
J2  CORTEX_DEBUG  [2X5-PTH-1.27MM-NO_SILK]  12.36,46.02 270 top
J3  [1X12_SM_SQ_NOSILK]  8.13,33.53 90 top
J4  [1X16_SM_SQ_NOSILK]  28.45,23.37 90 top
J5  USB Female Type C Connector  [USB-C-16P-4LAYER-ISOLATED]  18.29,15.75 0 top
J6  QWIIC_RIGHT_ANGLE  [JST04_1MM_RA]  11.94,18.8 270 top
J7  [JST-2-SMD]  33.71,27.18 90 top
J8  U.FL  [U.FL]  22.14,65.49 180 top
J9  USB Female Type C Connector  [USB-C-16P-4LAYER-ISOLATED]  41.66,15.75 0 top
J10  CORTEX_DEBUG  [2X5-PTH-1.27MM-NO_SILK]  35.72,46.02 270 top
J11  QWIIC_RIGHT_ANGLE  [JST04_1MM_RA]  35.31,18.8 270 top
J12  [1X12_SM_SQ_NOSILK]  31.5,33.53 90 top
J13  [1X16_SM_SQ_NOSILK]  51.82,23.37 90 top
J14  U.FL  [U.FL]  45.51,65.49 180 top
J15  [JST-2-SMD]  57.07,27.18 90 top
J16  USB Female Type C Connector  [USB-C-16P-4LAYER-ISOLATED]  65.02,15.75 0 top
J17  CORTEX_DEBUG  [2X5-PTH-1.27MM-NO_SILK]  59.09,46.02 270 top
J18  QWIIC_RIGHT_ANGLE  [JST04_1MM_RA]  58.67,18.8 270 top
J19  [1X12_SM_SQ_NOSILK]  54.86,33.53 90 top
J20  [1X16_SM_SQ_NOSILK]  75.18,23.37 90 top
J21  U.FL  [U.FL]  68.88,65.49 180 top
J22  [JST-2-SMD]  80.44,27.18 90 top
J23  USB Female Type C Connector  [USB-C-16P-4LAYER-ISOLATED]  88.39,15.75 0 top
J24  CORTEX_DEBUG  [2X5-PTH-1.27MM-NO_SILK]  82.46,46.02 270 top
J25  QWIIC_RIGHT_ANGLE  [JST04_1MM_RA]  82.04,18.8 270 top
J26  [1X12_SM_SQ_NOSILK]  78.23,33.53 90 top
J27  [1X16_SM_SQ_NOSILK]  98.55,23.37 90 top
J28  U.FL  [U.FL]  92.25,65.49 180 top
J29  [JST-2-SMD]  103.81,27.18 90 top
J30  USB Female Type C Connector  [USB-C-16P-4LAYER-ISOLATED]  111.76,15.75 0 top
J31  CORTEX_DEBUG  [2X5-PTH-1.27MM-NO_SILK]  105.83,46.02 270 top
J32  QWIIC_RIGHT_ANGLE  [JST04_1MM_RA]  105.41,18.8 270 top
J33  [1X12_SM_SQ_NOSILK]  101.6,33.53 90 top
J34  [1X16_SM_SQ_NOSILK]  121.92,23.37 90 top
J35  U.FL  [U.FL]  115.61,65.49 180 top
J36  [JST-2-SMD]  10.34,88.65 90 top
J37  USB Female Type C Connector  [USB-C-16P-4LAYER-ISOLATED]  18.29,77.22 0 top
J38  CORTEX_DEBUG  [2X5-PTH-1.27MM-NO_SILK]  12.36,107.49 270 top
J39  QWIIC_RIGHT_ANGLE  [JST04_1MM_RA]  11.94,80.26 270 top
J40  [1X12_SM_SQ_NOSILK]  8.13,95 90 top
J41  [1X16_SM_SQ_NOSILK]  28.45,84.84 90 top
J42  U.FL  [U.FL]  22.14,126.96 180 top
J43  [JST-2-SMD]  33.71,88.65 90 top
J44  USB Female Type C Connector  [USB-C-16P-4LAYER-ISOLATED]  41.66,77.22 0 top
J45  CORTEX_DEBUG  [2X5-PTH-1.27MM-NO_SILK]  35.72,107.49 270 top
J46  QWIIC_RIGHT_ANGLE  [JST04_1MM_RA]  35.31,80.26 270 top
J47  [1X12_SM_SQ_NOSILK]  31.5,95 90 top
J48  [1X16_SM_SQ_NOSILK]  51.82,84.84 90 top
J49  U.FL  [U.FL]  45.51,126.96 180 top
J50  [JST-2-SMD]  57.07,88.65 90 top
J51  USB Female Type C Connector  [USB-C-16P-4LAYER-ISOLATED]  65.02,77.22 0 top
J52  CORTEX_DEBUG  [2X5-PTH-1.27MM-NO_SILK]  59.09,107.49 270 top
J53  QWIIC_RIGHT_ANGLE  [JST04_1MM_RA]  58.67,80.26 270 top
J54  [1X12_SM_SQ_NOSILK]  54.86,95 90 top
J55  [1X16_SM_SQ_NOSILK]  75.18,84.84 90 top
J56  U.FL  [U.FL]  68.88,126.96 180 top
J57  [JST-2-SMD]  80.44,88.65 90 top
J58  USB Female Type C Connector  [USB-C-16P-4LAYER-ISOLATED]  88.39,77.22 0 top
J59  CORTEX_DEBUG  [2X5-PTH-1.27MM-NO_SILK]  82.46,107.49 270 top
J60  QWIIC_RIGHT_ANGLE  [JST04_1MM_RA]  82.04,80.26 270 top
J61  [1X12_SM_SQ_NOSILK]  78.23,95 90 top
J62  [1X16_SM_SQ_NOSILK]  98.55,84.84 90 top
J63  U.FL  [U.FL]  92.25,126.96 180 top
J64  [JST-2-SMD]  103.81,88.65 90 top
J65  USB Female Type C Connector  [USB-C-16P-4LAYER-ISOLATED]  111.76,77.22 0 top
J66  CORTEX_DEBUG  [2X5-PTH-1.27MM-NO_SILK]  105.83,107.49 270 top
J67  QWIIC_RIGHT_ANGLE  [JST04_1MM_RA]  105.41,80.26 270 top
J68  [1X12_SM_SQ_NOSILK]  101.6,95 90 top
J69  [1X16_SM_SQ_NOSILK]  121.92,84.84 90 top
J70  U.FL  [U.FL]  115.61,126.96 180 top
J71  [JST-2-SMD]  10.34,150.11 90 top
J72  USB Female Type C Connector  [USB-C-16P-4LAYER-ISOLATED]  18.29,138.68 0 top
J73  CORTEX_DEBUG  [2X5-PTH-1.27MM-NO_SILK]  12.36,168.96 270 top
J74  QWIIC_RIGHT_ANGLE  [JST04_1MM_RA]  11.94,141.73 270 top
J75  [1X12_SM_SQ_NOSILK]  8.13,156.46 90 top
J76  [1X16_SM_SQ_NOSILK]  28.45,146.3 90 top
J77  U.FL  [U.FL]  22.14,188.43 180 top
J78  [JST-2-SMD]  33.71,150.11 90 top
J79  USB Female Type C Connector  [USB-C-16P-4LAYER-ISOLATED]  41.66,138.68 0 top
J80  CORTEX_DEBUG  [2X5-PTH-1.27MM-NO_SILK]  35.72,168.96 270 top
J81  QWIIC_RIGHT_ANGLE  [JST04_1MM_RA]  35.31,141.73 270 top
J82  [1X12_SM_SQ_NOSILK]  31.5,156.46 90 top
J83  [1X16_SM_SQ_NOSILK]  51.82,146.3 90 top
J84  U.FL  [U.FL]  45.51,188.43 180 top
J85  [JST-2-SMD]  57.07,150.11 90 top
J86  USB Female Type C Connector  [USB-C-16P-4LAYER-ISOLATED]  65.02,138.68 0 top
J87  CORTEX_DEBUG  [2X5-PTH-1.27MM-NO_SILK]  59.09,168.96 270 top
J88  QWIIC_RIGHT_ANGLE  [JST04_1MM_RA]  58.67,141.73 270 top
J89  [1X12_SM_SQ_NOSILK]  54.86,156.46 90 top
J90  [1X16_SM_SQ_NOSILK]  75.18,146.3 90 top
J91  U.FL  [U.FL]  68.88,188.43 180 top
J92  [JST-2-SMD]  80.44,150.11 90 top
J93  USB Female Type C Connector  [USB-C-16P-4LAYER-ISOLATED]  88.39,138.68 0 top
J94  CORTEX_DEBUG  [2X5-PTH-1.27MM-NO_SILK]  82.46,168.96 270 top
J95  QWIIC_RIGHT_ANGLE  [JST04_1MM_RA]  82.04,141.73 270 top
J96  [1X12_SM_SQ_NOSILK]  78.23,156.46 90 top
J97  [1X16_SM_SQ_NOSILK]  98.55,146.3 90 top
J98  U.FL  [U.FL]  92.25,188.43 180 top
J99  [JST-2-SMD]  103.81,150.11 90 top
J100  USB Female Type C Connector  [USB-C-16P-4LAYER-ISOLATED]  111.76,138.68 0 top
J101  CORTEX_DEBUG  [2X5-PTH-1.27MM-NO_SILK]  105.83,168.96 270 top
J102  QWIIC_RIGHT_ANGLE  [JST04_1MM_RA]  105.41,141.73 270 top
J103  [1X12_SM_SQ_NOSILK]  101.6,156.46 90 top
J104  [1X16_SM_SQ_NOSILK]  121.92,146.3 90 top
J105  U.FL  [U.FL]  115.61,188.43 180 top
LED  JUMPER-SMT_2_NC_TRACE_SILK  [SMT-JUMPER_2_NC_TRACE_SILK]  18.24,36.25 270 bottom
LED1  JUMPER-SMT_2_NC_TRACE_SILK  [SMT-JUMPER_2_NC_TRACE_SILK]  41.61,36.25 270 bottom
LED2  JUMPER-SMT_2_NC_TRACE_SILK  [SMT-JUMPER_2_NC_TRACE_SILK]  64.97,36.25 270 bottom
LED3  JUMPER-SMT_2_NC_TRACE_SILK  [SMT-JUMPER_2_NC_TRACE_SILK]  88.34,36.25 270 bottom
LED4  JUMPER-SMT_2_NC_TRACE_SILK  [SMT-JUMPER_2_NC_TRACE_SILK]  111.71,36.25 270 bottom
LED5  JUMPER-SMT_2_NC_TRACE_SILK  [SMT-JUMPER_2_NC_TRACE_SILK]  18.24,97.71 270 bottom
LED6  JUMPER-SMT_2_NC_TRACE_SILK  [SMT-JUMPER_2_NC_TRACE_SILK]  41.61,97.71 270 bottom
LED7  JUMPER-SMT_2_NC_TRACE_SILK  [SMT-JUMPER_2_NC_TRACE_SILK]  64.97,97.71 270 bottom
LED8  JUMPER-SMT_2_NC_TRACE_SILK  [SMT-JUMPER_2_NC_TRACE_SILK]  88.34,97.71 270 bottom
LED9  JUMPER-SMT_2_NC_TRACE_SILK  [SMT-JUMPER_2_NC_TRACE_SILK]  111.71,97.71 270 bottom
LED10  JUMPER-SMT_2_NC_TRACE_SILK  [SMT-JUMPER_2_NC_TRACE_SILK]  18.24,159.18 270 bottom
LED11  JUMPER-SMT_2_NC_TRACE_SILK  [SMT-JUMPER_2_NC_TRACE_SILK]  41.61,159.18 270 bottom
LED12  JUMPER-SMT_2_NC_TRACE_SILK  [SMT-JUMPER_2_NC_TRACE_SILK]  64.97,159.18 270 bottom
LED13  JUMPER-SMT_2_NC_TRACE_SILK  [SMT-JUMPER_2_NC_TRACE_SILK]  88.34,159.18 270 bottom
LED14  JUMPER-SMT_2_NC_TRACE_SILK  [SMT-JUMPER_2_NC_TRACE_SILK]  111.71,159.18 270 bottom
LOGO1  OSHW-LOGOS  [OSHW-LOGO-S]  18.29,64.64 0 bottom
LOGO2  QWIIC_LOGO_5MM  [QWIIC_5MM]  13.72,18.92 90 top
LOGO3  SFE_LOGO_NAME_FLAME.1_INCH  [SFE_LOGO_NAME_FLAME_.1]  24.13,19.49 0 bottom
LOGO4  QWIIC_LOGO_5MM  [QWIIC_5MM]  37.08,18.92 90 top
LOGO5  SFE_LOGO_NAME_FLAME.1_INCH  [SFE_LOGO_NAME_FLAME_.1]  47.5,19.49 0 bottom
LOGO6  OSHW-LOGOS  [OSHW-LOGO-S]  41.66,64.64 0 bottom
LOGO7  QWIIC_LOGO_5MM  [QWIIC_5MM]  60.45,18.92 90 top
LOGO8  SFE_LOGO_NAME_FLAME.1_INCH  [SFE_LOGO_NAME_FLAME_.1]  70.87,19.49 0 bottom
LOGO9  OSHW-LOGOS  [OSHW-LOGO-S]  65.02,64.64 0 bottom
LOGO10  QWIIC_LOGO_5MM  [QWIIC_5MM]  83.82,18.92 90 top
LOGO11  SFE_LOGO_NAME_FLAME.1_INCH  [SFE_LOGO_NAME_FLAME_.1]  94.23,19.49 0 bottom
LOGO12  OSHW-LOGOS  [OSHW-LOGO-S]  88.39,64.64 0 bottom
LOGO13  QWIIC_LOGO_5MM  [QWIIC_5MM]  107.19,18.92 90 top
LOGO14  SFE_LOGO_NAME_FLAME.1_INCH  [SFE_LOGO_NAME_FLAME_.1]  117.6,19.49 0 bottom
LOGO15  OSHW-LOGOS  [OSHW-LOGO-S]  111.76,64.64 0 bottom
LOGO16  QWIIC_LOGO_5MM  [QWIIC_5MM]  13.72,80.39 90 top
LOGO17  SFE_LOGO_NAME_FLAME.1_INCH  [SFE_LOGO_NAME_FLAME_.1]  24.13,80.96 0 bottom
LOGO18  OSHW-LOGOS  [OSHW-LOGO-S]  18.29,126.11 0 bottom
LOGO19  QWIIC_LOGO_5MM  [QWIIC_5MM]  37.08,80.39 90 top
LOGO20  SFE_LOGO_NAME_FLAME.1_INCH  [SFE_LOGO_NAME_FLAME_.1]  47.5,80.96 0 bottom
LOGO21  OSHW-LOGOS  [OSHW-LOGO-S]  41.66,126.11 0 bottom
LOGO22  QWIIC_LOGO_5MM  [QWIIC_5MM]  60.45,80.39 90 top
LOGO23  SFE_LOGO_NAME_FLAME.1_INCH  [SFE_LOGO_NAME_FLAME_.1]  70.87,80.96 0 bottom
LOGO24  OSHW-LOGOS  [OSHW-LOGO-S]  65.02,126.11 0 bottom
LOGO25  QWIIC_LOGO_5MM  [QWIIC_5MM]  83.82,80.39 90 top
LOGO26  SFE_LOGO_NAME_FLAME.1_INCH  [SFE_LOGO_NAME_FLAME_.1]  94.23,80.96 0 bottom
LOGO27  OSHW-LOGOS  [OSHW-LOGO-S]  88.39,126.11 0 bottom
LOGO28  QWIIC_LOGO_5MM  [QWIIC_5MM]  107.19,80.39 90 top
LOGO29  SFE_LOGO_NAME_FLAME.1_INCH  [SFE_LOGO_NAME_FLAME_.1]  117.6,80.96 0 bottom
LOGO30  OSHW-LOGOS  [OSHW-LOGO-S]  111.76,126.11 0 bottom
LOGO31  QWIIC_LOGO_5MM  [QWIIC_5MM]  13.72,141.86 90 top
LOGO32  SFE_LOGO_NAME_FLAME.1_INCH  [SFE_LOGO_NAME_FLAME_.1]  24.13,142.43 0 bottom
LOGO33  OSHW-LOGOS  [OSHW-LOGO-S]  18.29,187.58 0 bottom
LOGO34  QWIIC_LOGO_5MM  [QWIIC_5MM]  37.08,141.86 90 top
LOGO35  SFE_LOGO_NAME_FLAME.1_INCH  [SFE_LOGO_NAME_FLAME_.1]  47.5,142.43 0 bottom
LOGO36  OSHW-LOGOS  [OSHW-LOGO-S]  41.66,187.58 0 bottom
LOGO37  QWIIC_LOGO_5MM  [QWIIC_5MM]  60.45,141.86 90 top
LOGO38  SFE_LOGO_NAME_FLAME.1_INCH  [SFE_LOGO_NAME_FLAME_.1]  70.87,142.43 0 bottom
LOGO39  OSHW-LOGOS  [OSHW-LOGO-S]  65.02,187.58 0 bottom
LOGO40  QWIIC_LOGO_5MM  [QWIIC_5MM]  83.82,141.86 90 top
LOGO41  SFE_LOGO_NAME_FLAME.1_INCH  [SFE_LOGO_NAME_FLAME_.1]  94.23,142.43 0 bottom
LOGO42  OSHW-LOGOS  [OSHW-LOGO-S]  88.39,187.58 0 bottom
LOGO43  QWIIC_LOGO_5MM  [QWIIC_5MM]  107.19,141.86 90 top
LOGO44  SFE_LOGO_NAME_FLAME.1_INCH  [SFE_LOGO_NAME_FLAME_.1]  117.6,142.43 0 bottom
LOGO45  OSHW-LOGOS  [OSHW-LOGO-S]  111.76,187.58 0 bottom
R1  1k  [0603]  16.76,40 90 top
R2  2.0k  [0603]  14.99,32 0 top
R3  10k  [0603]  22.21,30.81 180 top
R4  1k  [0603]  18.29,40 270 top
R5  5.1k  [0603]  20.32,19.81 270 top
R6  5.1k  [0603]  18.77,19.79 270 top
R7  1k  [0603]  21.34,40 270 top
R8  1k  [0603]  19.81,40 270 top
R9  10k  [0603]  45.58,30.81 180 top
R10  1k  [0603]  41.66,40 270 top
R11  100k  [0603]  22.86,24.96 180 top
R12  1k  [0603]  15.24,40 270 top
R13  5.1k  [0603]  43.69,19.81 270 top
R14  1k  [0603]  43.18,40 270 top
R15  5.1k  [0603]  42.14,19.79 270 top
R16  100k  [0603]  46.23,24.96 180 top
R17  1k  [0603]  44.7,40 270 top
R18  1k  [0603]  38.61,40 270 top
R19  2.0k  [0603]  38.35,32 0 top
R20  1k  [0603]  40.13,40 90 top
R21  10k  [0603]  68.95,30.81 180 top
R22  1k  [0603]  65.02,40 270 top
R23  5.1k  [0603]  67.06,19.81 270 top
R24  1k  [0603]  66.55,40 270 top
R25  5.1k  [0603]  65.51,19.79 270 top
R26  100k  [0603]  69.6,24.96 180 top
R27  1k  [0603]  68.07,40 270 top
R28  1k  [0603]  61.98,40 270 top
R29  2.0k  [0603]  61.72,32 0 top
R30  1k  [0603]  63.5,40 90 top
R31  10k  [0603]  92.32,30.81 180 top
R32  1k  [0603]  88.39,40 270 top
R33  5.1k  [0603]  90.42,19.81 270 top
R34  1k  [0603]  89.92,40 270 top
R35  5.1k  [0603]  88.87,19.79 270 top
R36  100k  [0603]  92.96,24.96 180 top
R37  1k  [0603]  91.44,40 270 top
R38  1k  [0603]  85.34,40 270 top
R39  2.0k  [0603]  85.09,32 0 top
R40  1k  [0603]  86.87,40 90 top
R41  10k  [0603]  115.68,30.81 180 top
R42  1k  [0603]  111.76,40 270 top
R43  5.1k  [0603]  113.79,19.81 270 top
R44  1k  [0603]  113.28,40 270 top
R45  5.1k  [0603]  112.24,19.79 270 top
R46  100k  [0603]  116.33,24.96 180 top
R47  1k  [0603]  114.81,40 270 top
R48  1k  [0603]  108.71,40 270 top
R49  2.0k  [0603]  108.46,32 0 top
R50  1k  [0603]  110.24,40 90 top
R51  10k  [0603]  22.21,92.28 180 top
R52  1k  [0603]  18.29,101.47 270 top
R53  5.1k  [0603]  20.32,81.28 270 top
R54  1k  [0603]  19.81,101.47 270 top
R55  5.1k  [0603]  18.77,81.25 270 top
R56  100k  [0603]  22.86,86.42 180 top
R57  1k  [0603]  21.34,101.47 270 top
R58  1k  [0603]  15.24,101.47 270 top
R59  2.0k  [0603]  14.99,93.47 0 top
R60  1k  [0603]  16.76,101.47 90 top
R61  10k  [0603]  45.58,92.28 180 top
R62  1k  [0603]  41.66,101.47 270 top
R63  5.1k  [0603]  43.69,81.28 270 top
R64  1k  [0603]  43.18,101.47 270 top
R65  5.1k  [0603]  42.14,81.25 270 top
R66  100k  [0603]  46.23,86.42 180 top
R67  1k  [0603]  44.7,101.47 270 top
R68  1k  [0603]  38.61,101.47 270 top
R69  2.0k  [0603]  38.35,93.47 0 top
R70  1k  [0603]  40.13,101.47 90 top
R71  10k  [0603]  68.95,92.28 180 top
R72  1k  [0603]  65.02,101.47 270 top
R73  5.1k  [0603]  67.06,81.28 270 top
R74  1k  [0603]  66.55,101.47 270 top
R75  5.1k  [0603]  65.51,81.25 270 top
R76  100k  [0603]  69.6,86.42 180 top
R77  1k  [0603]  68.07,101.47 270 top
R78  1k  [0603]  61.98,101.47 270 top
R79  2.0k  [0603]  61.72,93.47 0 top
R80  1k  [0603]  63.5,101.47 90 top
R81  10k  [0603]  92.32,92.28 180 top
R82  1k  [0603]  88.39,101.47 270 top
R83  5.1k  [0603]  90.42,81.28 270 top
R84  1k  [0603]  89.92,101.47 270 top
R85  5.1k  [0603]  88.87,81.25 270 top
R86  100k  [0603]  92.96,86.42 180 top
R87  1k  [0603]  91.44,101.47 270 top
R88  1k  [0603]  85.34,101.47 270 top
R89  2.0k  [0603]  85.09,93.47 0 top
R90  1k  [0603]  86.87,101.47 90 top
R91  10k  [0603]  115.68,92.28 180 top
R92  1k  [0603]  111.76,101.47 270 top
R93  5.1k  [0603]  113.79,81.28 270 top
R94  1k  [0603]  113.28,101.47 270 top
R95  5.1k  [0603]  112.24,81.25 270 top
R96  100k  [0603]  116.33,86.42 180 top
R97  1k  [0603]  114.81,101.47 270 top
R98  1k  [0603]  108.71,101.47 270 top
R99  2.0k  [0603]  108.46,93.47 0 top
R100  1k  [0603]  110.24,101.47 90 top
R101  10k  [0603]  22.21,153.75 180 top
R102  1k  [0603]  18.29,162.94 270 top
R103  5.1k  [0603]  20.32,142.75 270 top
R104  1k  [0603]  19.81,162.94 270 top
R105  5.1k  [0603]  18.77,142.72 270 top
R106  100k  [0603]  22.86,147.89 180 top
R107  1k  [0603]  21.34,162.94 270 top
R108  1k  [0603]  15.24,162.94 270 top
R109  2.0k  [0603]  14.99,154.94 0 top
R110  1k  [0603]  16.76,162.94 90 top
R111  10k  [0603]  45.58,153.75 180 top
R112  1k  [0603]  41.66,162.94 270 top
R113  5.1k  [0603]  43.69,142.75 270 top
R114  1k  [0603]  43.18,162.94 270 top
R115  5.1k  [0603]  42.14,142.72 270 top
R116  100k  [0603]  46.23,147.89 180 top
R117  1k  [0603]  44.7,162.94 270 top
R118  1k  [0603]  38.61,162.94 270 top
R119  2.0k  [0603]  38.35,154.94 0 top
R120  1k  [0603]  40.13,162.94 90 top
R121  10k  [0603]  68.95,153.75 180 top
R122  1k  [0603]  65.02,162.94 270 top
R123  5.1k  [0603]  67.06,142.75 270 top
R124  1k  [0603]  66.55,162.94 270 top
R125  5.1k  [0603]  65.51,142.72 270 top
R126  100k  [0603]  69.6,147.89 180 top
R127  1k  [0603]  68.07,162.94 270 top
R128  1k  [0603]  61.98,162.94 270 top
R129  2.0k  [0603]  61.72,154.94 0 top
R130  1k  [0603]  63.5,162.94 90 top
R131  10k  [0603]  92.32,153.75 180 top
R132  1k  [0603]  88.39,162.94 270 top
R133  5.1k  [0603]  90.42,142.75 270 top
R134  1k  [0603]  89.92,162.94 270 top
R135  5.1k  [0603]  88.87,142.72 270 top
R136  100k  [0603]  92.96,147.89 180 top
R137  1k  [0603]  91.44,162.94 270 top
R138  1k  [0603]  85.34,162.94 270 top
R139  2.0k  [0603]  85.09,154.94 0 top
R140  1k  [0603]  86.87,162.94 90 top
R141  10k  [0603]  115.68,153.75 180 top
R142  1k  [0603]  111.76,162.94 270 top
R143  5.1k  [0603]  113.79,142.75 270 top
R144  1k  [0603]  113.28,162.94 270 top
R145  5.1k  [0603]  112.24,142.72 270 top
R146  100k  [0603]  116.33,147.89 180 top
R147  1k  [0603]  114.81,162.94 270 top
R148  1k  [0603]  108.71,162.94 270 top
R149  2.0k  [0603]  108.46,154.94 0 top
R150  1k  [0603]  110.24,162.94 90 top
RTS  JUMPER-SMT_2_NO_SILK  [SMT-JUMPER_2_NO_SILK]  22.1,30.99 270 bottom
RTS1  JUMPER-SMT_2_NO_SILK  [SMT-JUMPER_2_NO_SILK]  45.47,30.99 270 bottom
RTS2  JUMPER-SMT_2_NO_SILK  [SMT-JUMPER_2_NO_SILK]  68.83,30.99 270 bottom
RTS3  JUMPER-SMT_2_NO_SILK  [SMT-JUMPER_2_NO_SILK]  92.2,30.99 270 bottom
RTS4  JUMPER-SMT_2_NO_SILK  [SMT-JUMPER_2_NO_SILK]  115.57,30.99 270 bottom
RTS5  JUMPER-SMT_2_NO_SILK  [SMT-JUMPER_2_NO_SILK]  22.1,92.46 270 bottom
RTS6  JUMPER-SMT_2_NO_SILK  [SMT-JUMPER_2_NO_SILK]  45.47,92.46 270 bottom
RTS7  JUMPER-SMT_2_NO_SILK  [SMT-JUMPER_2_NO_SILK]  68.83,92.46 270 bottom
RTS8  JUMPER-SMT_2_NO_SILK  [SMT-JUMPER_2_NO_SILK]  92.2,92.46 270 bottom
RTS9  JUMPER-SMT_2_NO_SILK  [SMT-JUMPER_2_NO_SILK]  115.57,92.46 270 bottom
RTS10  JUMPER-SMT_2_NO_SILK  [SMT-JUMPER_2_NO_SILK]  22.1,153.92 270 bottom
RTS11  JUMPER-SMT_2_NO_SILK  [SMT-JUMPER_2_NO_SILK]  45.47,153.92 270 bottom
RTS12  JUMPER-SMT_2_NO_SILK  [SMT-JUMPER_2_NO_SILK]  68.83,153.92 270 bottom
RTS13  JUMPER-SMT_2_NO_SILK  [SMT-JUMPER_2_NO_SILK]  92.2,153.92 270 bottom
RTS14  JUMPER-SMT_2_NO_SILK  [SMT-JUMPER_2_NO_SILK]  115.57,153.92 270 bottom
S1  RESET  [TACTILE_SWITCH_SMD_4.6X2.8MM]  22.86,19.81 270 top
S2  USER  [TACTILE_SWITCH_SMD_4.6X2.8MM]  16.21,19.84 270 top
S3  RESET  [TACTILE_SWITCH_SMD_4.6X2.8MM]  46.23,19.81 270 top
S4  USER  [TACTILE_SWITCH_SMD_4.6X2.8MM]  39.57,19.84 270 top
S5  RESET  [TACTILE_SWITCH_SMD_4.6X2.8MM]  69.6,19.81 270 top
S6  USER  [TACTILE_SWITCH_SMD_4.6X2.8MM]  62.94,19.84 270 top
S7  RESET  [TACTILE_SWITCH_SMD_4.6X2.8MM]  92.96,19.81 270 top
S8  USER  [TACTILE_SWITCH_SMD_4.6X2.8MM]  86.31,19.84 270 top
S9  RESET  [TACTILE_SWITCH_SMD_4.6X2.8MM]  116.33,19.81 270 top
S10  USER  [TACTILE_SWITCH_SMD_4.6X2.8MM]  109.68,19.84 270 top
S11  RESET  [TACTILE_SWITCH_SMD_4.6X2.8MM]  22.86,81.28 270 top
S12  USER  [TACTILE_SWITCH_SMD_4.6X2.8MM]  16.21,81.31 270 top
S13  RESET  [TACTILE_SWITCH_SMD_4.6X2.8MM]  46.23,81.28 270 top
S14  USER  [TACTILE_SWITCH_SMD_4.6X2.8MM]  39.57,81.31 270 top
S15  RESET  [TACTILE_SWITCH_SMD_4.6X2.8MM]  69.6,81.28 270 top
S16  USER  [TACTILE_SWITCH_SMD_4.6X2.8MM]  62.94,81.31 270 top
S17  RESET  [TACTILE_SWITCH_SMD_4.6X2.8MM]  92.96,81.28 270 top
S18  USER  [TACTILE_SWITCH_SMD_4.6X2.8MM]  86.31,81.31 270 top
S19  RESET  [TACTILE_SWITCH_SMD_4.6X2.8MM]  116.33,81.28 270 top
S20  USER  [TACTILE_SWITCH_SMD_4.6X2.8MM]  109.68,81.31 270 top
S21  RESET  [TACTILE_SWITCH_SMD_4.6X2.8MM]  22.86,142.75 270 top
S22  USER  [TACTILE_SWITCH_SMD_4.6X2.8MM]  16.21,142.77 270 top
S23  RESET  [TACTILE_SWITCH_SMD_4.6X2.8MM]  46.23,142.75 270 top
S24  USER  [TACTILE_SWITCH_SMD_4.6X2.8MM]  39.57,142.77 270 top
S25  RESET  [TACTILE_SWITCH_SMD_4.6X2.8MM]  69.6,142.75 270 top
S26  USER  [TACTILE_SWITCH_SMD_4.6X2.8MM]  62.94,142.77 270 top
S27  RESET  [TACTILE_SWITCH_SMD_4.6X2.8MM]  92.96,142.75 270 top
S28  USER  [TACTILE_SWITCH_SMD_4.6X2.8MM]  86.31,142.77 270 top
S29  RESET  [TACTILE_SWITCH_SMD_4.6X2.8MM]  116.33,142.75 270 top
S30  USER  [TACTILE_SWITCH_SMD_4.6X2.8MM]  109.68,142.77 270 top
TP1  TEST-POINTTP_15TH_THRU  [TP_15TH]  11.94,50.04 0 top
TP2  TEST-POINTTP_15TH_THRU  [TP_15TH]  19.56,46.23 0 top
TP3  TEST-POINTTP_15TH_THRU  [TP_15TH]  22.1,44.96 0 top
TP4  TEST-POINTTP_15TH_THRU  [TP_15TH]  10.67,17.02 0 top
TP5  TEST-POINTTP_15TH_THRU  [TP_15TH]  9.4,18.29 0 top
TP6  TEST-POINTTP_15TH_THRU  [TP_15TH]  14.48,47.5 0 top
TP7  TEST-POINTTP_15TH_THRU  [TP_15TH]  42.93,46.23 0 top
TP8  TEST-POINTTP_15TH_THRU  [TP_15TH]  45.47,44.96 0 top
TP9  TEST-POINTTP_15TH_THRU  [TP_15TH]  34.04,17.02 0 top
TP10  TEST-POINTTP_15TH_THRU  [TP_15TH]  32.77,18.29 0 top
TP11  TEST-POINTTP_15TH_THRU  [TP_15TH]  35.31,50.04 0 top
TP12  TEST-POINTTP_15TH_THRU  [TP_15TH]  37.85,47.5 0 top
TP13  TEST-POINTTP_15TH_THRU  [TP_15TH]  66.29,46.23 0 top
TP14  TEST-POINTTP_15TH_THRU  [TP_15TH]  68.83,44.96 0 top
TP15  TEST-POINTTP_15TH_THRU  [TP_15TH]  57.4,17.02 0 top
TP16  TEST-POINTTP_15TH_THRU  [TP_15TH]  56.13,18.29 0 top
TP17  TEST-POINTTP_15TH_THRU  [TP_15TH]  58.67,50.04 0 top
TP18  TEST-POINTTP_15TH_THRU  [TP_15TH]  61.21,47.5 0 top
TP19  TEST-POINTTP_15TH_THRU  [TP_15TH]  89.66,46.23 0 top
TP20  TEST-POINTTP_15TH_THRU  [TP_15TH]  92.2,44.96 0 top
TP21  TEST-POINTTP_15TH_THRU  [TP_15TH]  80.77,17.02 0 top
TP22  TEST-POINTTP_15TH_THRU  [TP_15TH]  79.5,18.29 0 top
TP23  TEST-POINTTP_15TH_THRU  [TP_15TH]  82.04,50.04 0 top
TP24  TEST-POINTTP_15TH_THRU  [TP_15TH]  84.58,47.5 0 top
TP25  TEST-POINTTP_15TH_THRU  [TP_15TH]  113.03,46.23 0 top
TP26  TEST-POINTTP_15TH_THRU  [TP_15TH]  115.57,44.96 0 top
TP27  TEST-POINTTP_15TH_THRU  [TP_15TH]  104.14,17.02 0 top
TP28  TEST-POINTTP_15TH_THRU  [TP_15TH]  102.87,18.29 0 top
TP29  TEST-POINTTP_15TH_THRU  [TP_15TH]  105.41,50.04 0 top
TP30  TEST-POINTTP_15TH_THRU  [TP_15TH]  107.95,47.5 0 top
TP31  TEST-POINTTP_15TH_THRU  [TP_15TH]  19.56,107.7 0 top
TP32  TEST-POINTTP_15TH_THRU  [TP_15TH]  22.1,106.43 0 top
TP33  TEST-POINTTP_15TH_THRU  [TP_15TH]  10.67,78.49 0 top
TP34  TEST-POINTTP_15TH_THRU  [TP_15TH]  9.4,79.76 0 top
TP35  TEST-POINTTP_15TH_THRU  [TP_15TH]  11.94,111.51 0 top
TP36  TEST-POINTTP_15TH_THRU  [TP_15TH]  14.48,108.97 0 top
TP37  TEST-POINTTP_15TH_THRU  [TP_15TH]  42.93,107.7 0 top
TP38  TEST-POINTTP_15TH_THRU  [TP_15TH]  45.47,106.43 0 top
TP39  TEST-POINTTP_15TH_THRU  [TP_15TH]  34.04,78.49 0 top
TP40  TEST-POINTTP_15TH_THRU  [TP_15TH]  32.77,79.76 0 top
TP41  TEST-POINTTP_15TH_THRU  [TP_15TH]  35.31,111.51 0 top
TP42  TEST-POINTTP_15TH_THRU  [TP_15TH]  37.85,108.97 0 top
TP43  TEST-POINTTP_15TH_THRU  [TP_15TH]  66.29,107.7 0 top
TP44  TEST-POINTTP_15TH_THRU  [TP_15TH]  68.83,106.43 0 top
TP45  TEST-POINTTP_15TH_THRU  [TP_15TH]  57.4,78.49 0 top
TP46  TEST-POINTTP_15TH_THRU  [TP_15TH]  56.13,79.76 0 top
TP47  TEST-POINTTP_15TH_THRU  [TP_15TH]  58.67,111.51 0 top
TP48  TEST-POINTTP_15TH_THRU  [TP_15TH]  61.21,108.97 0 top
TP49  TEST-POINTTP_15TH_THRU  [TP_15TH]  89.66,107.7 0 top
TP50  TEST-POINTTP_15TH_THRU  [TP_15TH]  92.2,106.43 0 top
TP51  TEST-POINTTP_15TH_THRU  [TP_15TH]  80.77,78.49 0 top